# Allegro board proj1.brd
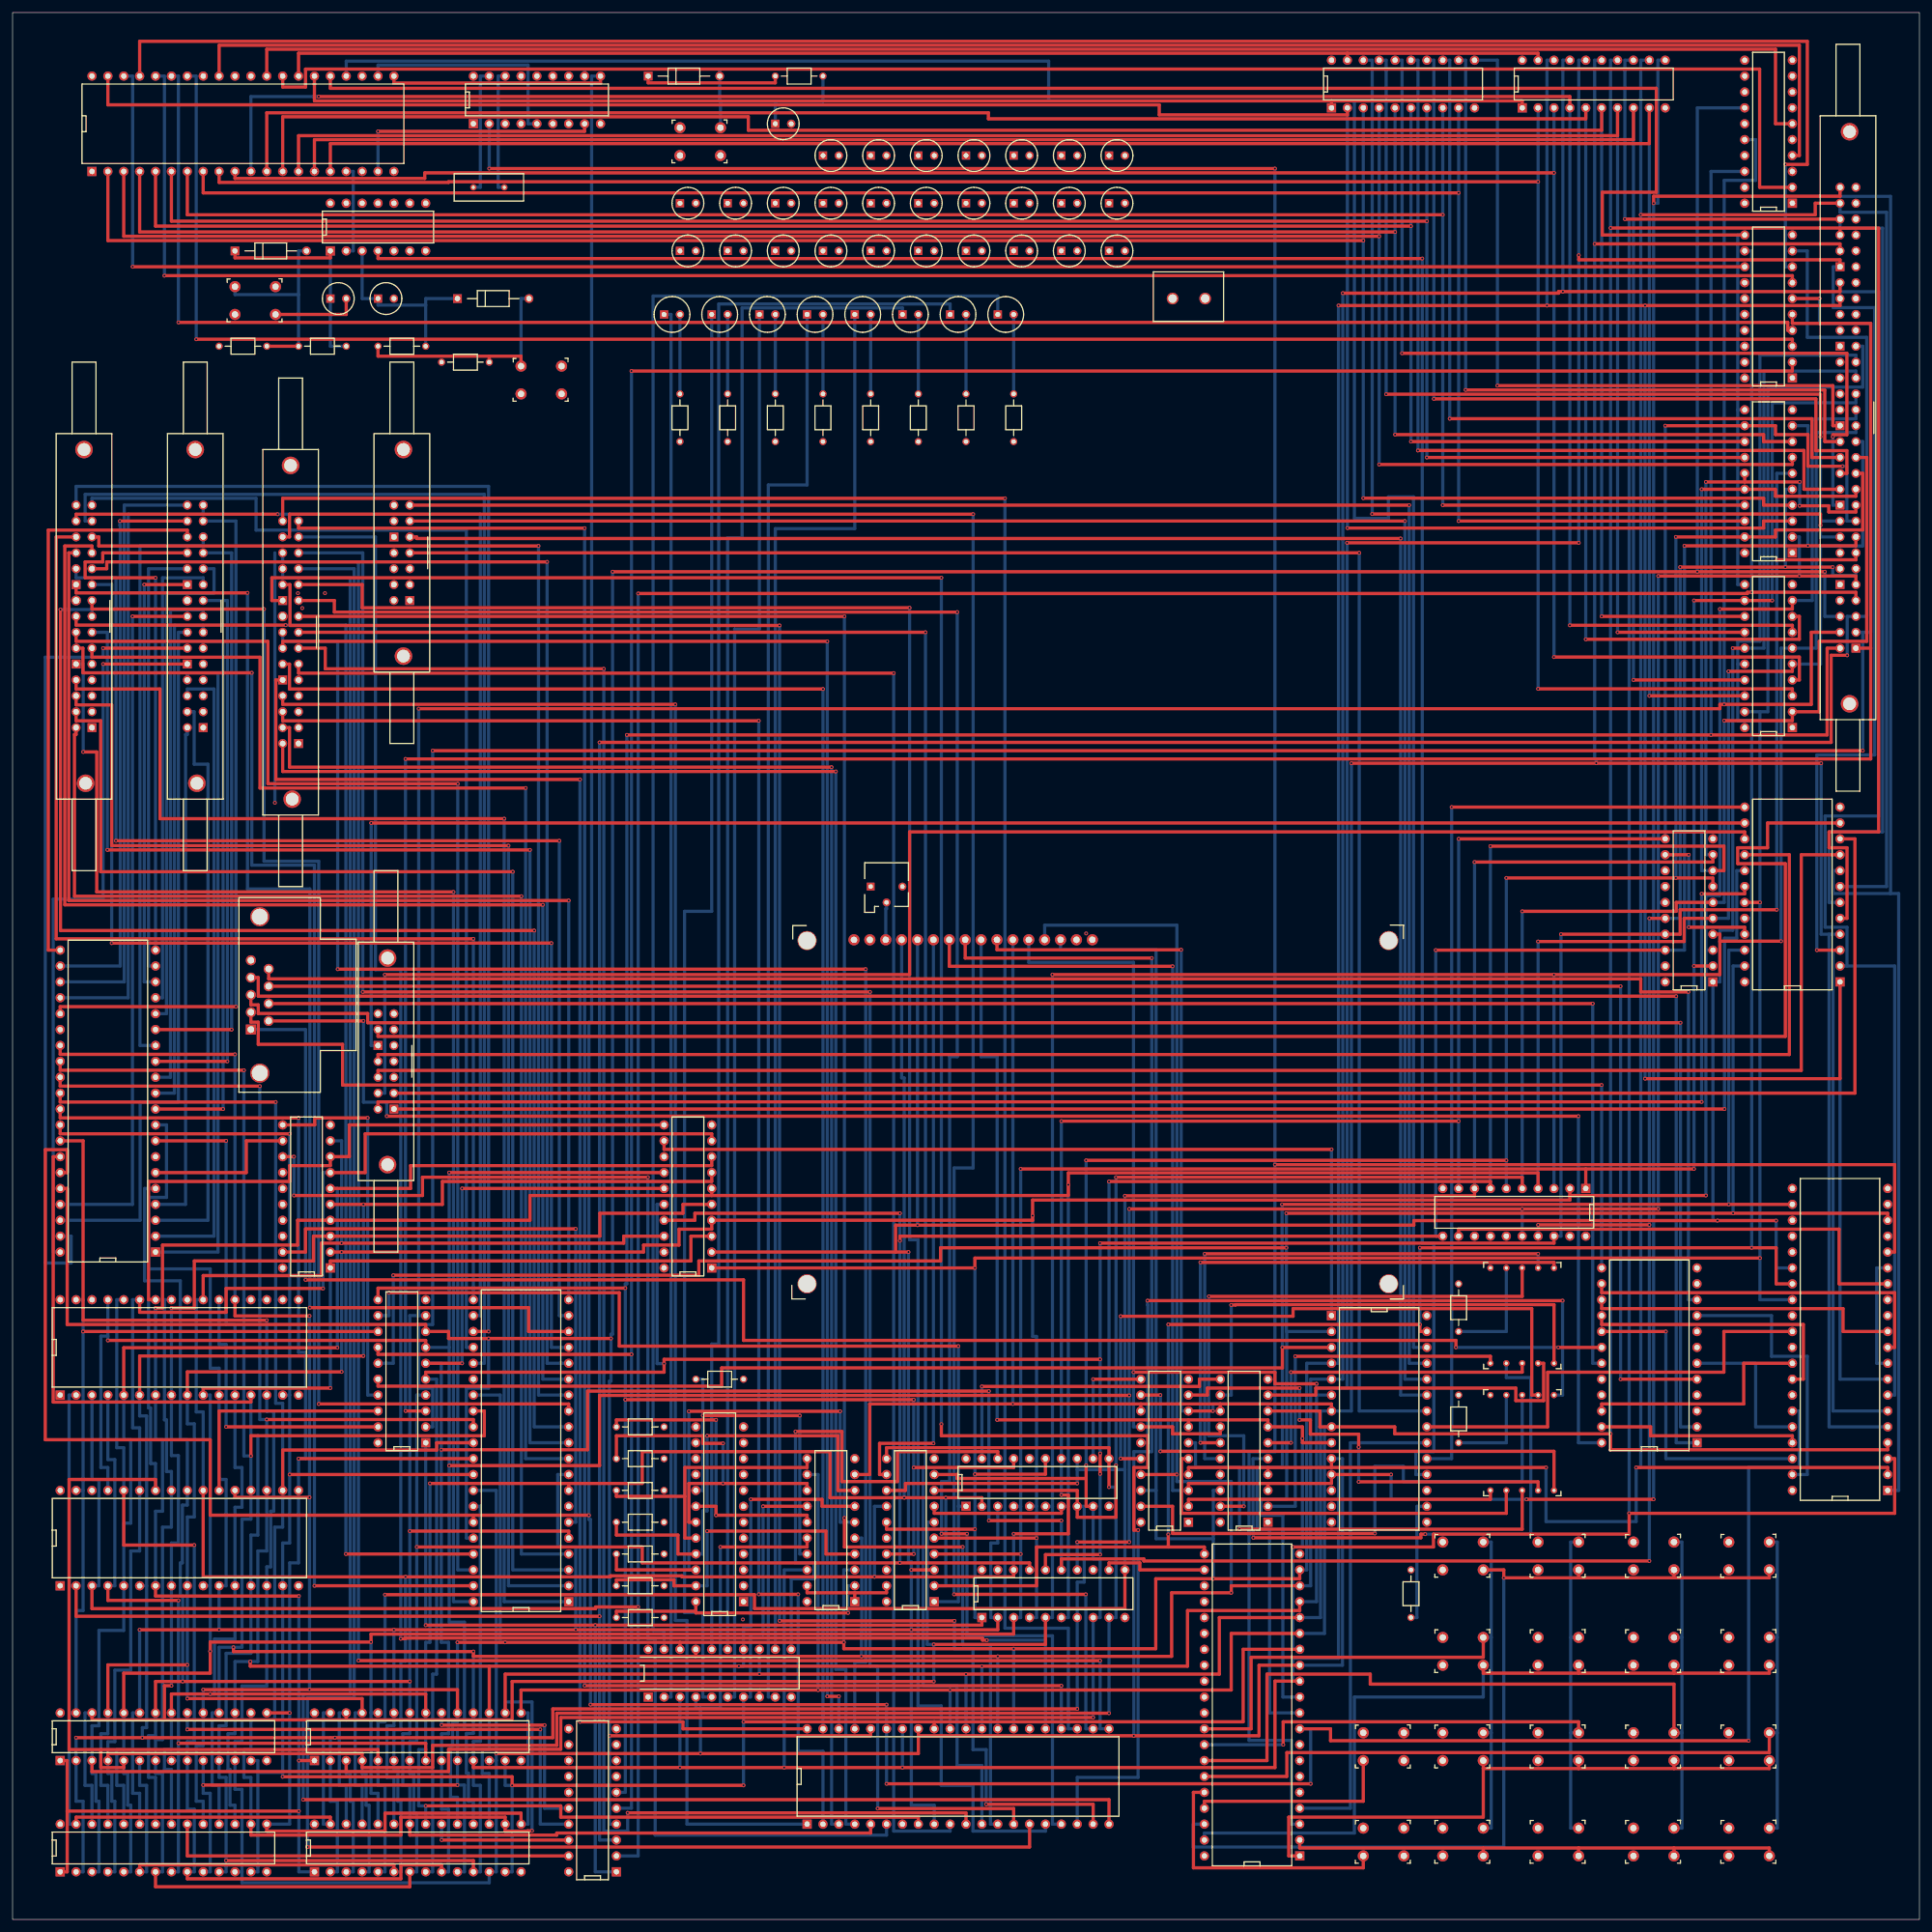
[diagram p0: board, top side]
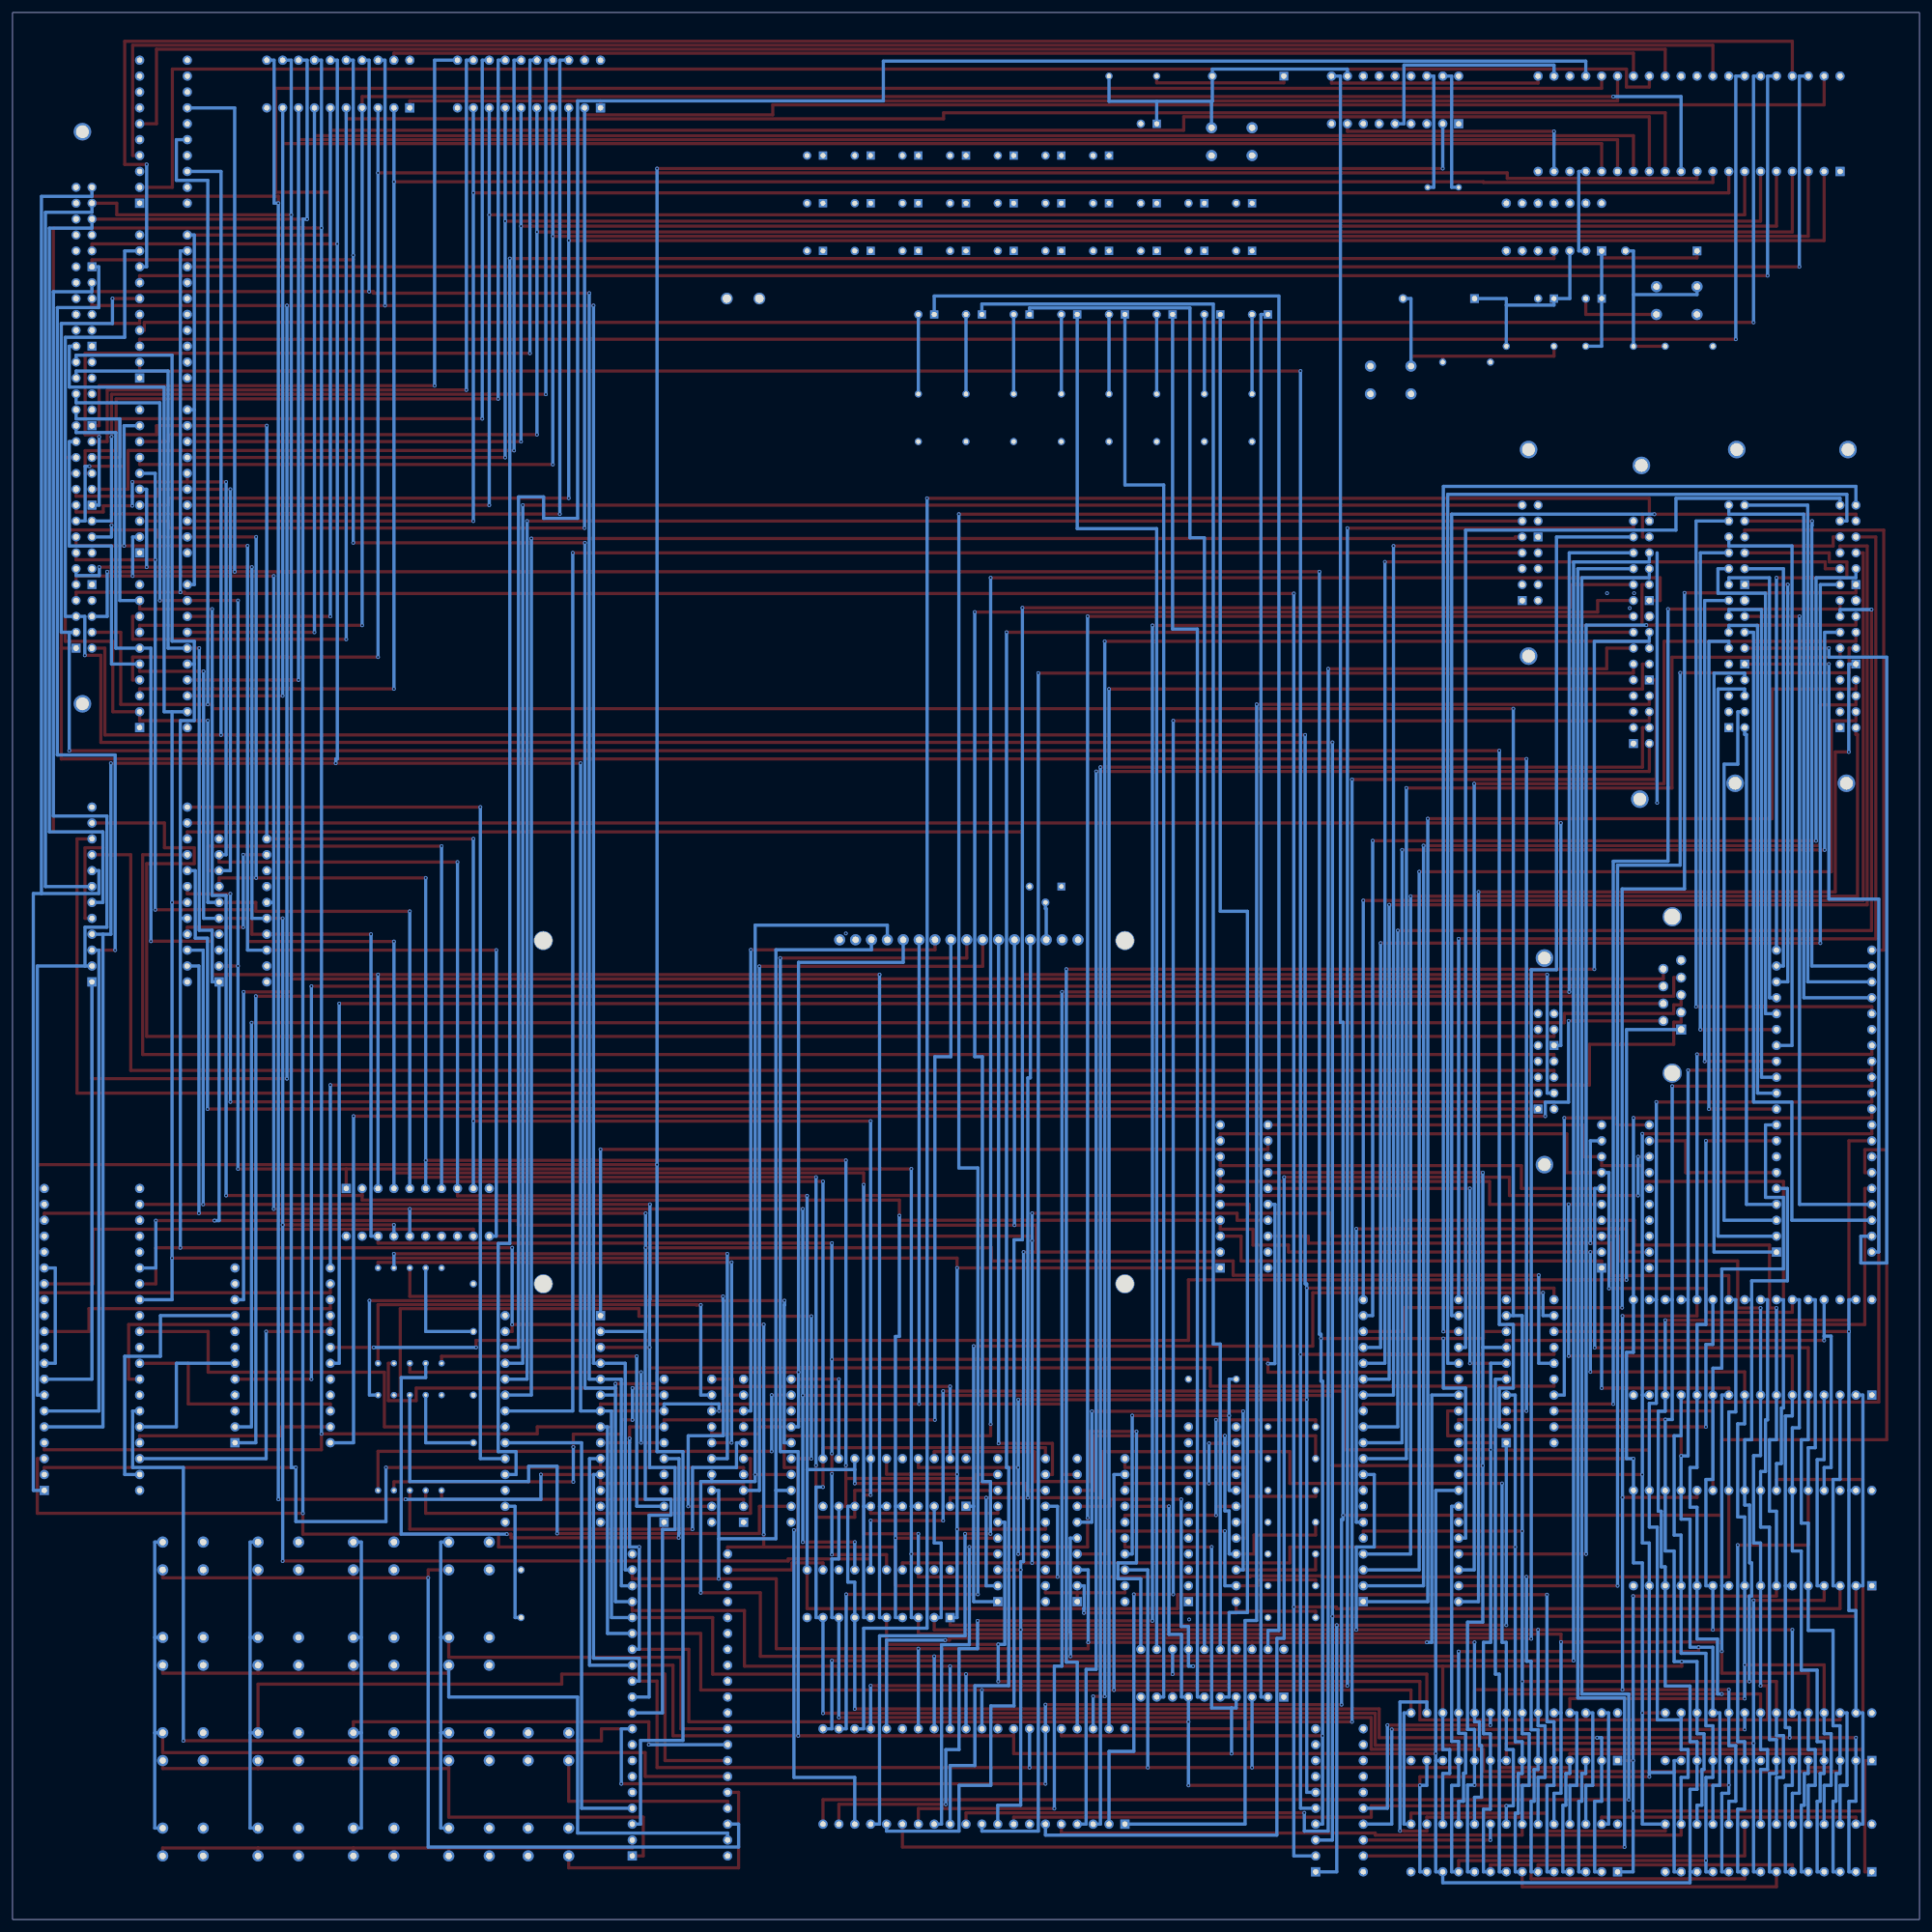
[diagram p1: board, bottom side, seen from below]

Outline 304.8 x 304.8 mm; copper layers: TOP, GND, POWER, BOTTOM. Coordinates in mm from the lower left corner of the outline.
Outline path: rectangle 0,0 304.8,304.8

## Placement (name value [footprint] x y rotation side)
C1  10u  [CPCYL1D200LS100031]  121.92 287.02 0 top
C8  0.1u  [CPCYL1D200LS100031]  175.26 266.7 0 top
C9  0.1u  [CPCYL1D200LS100031]  167.64 266.7 0 top
C10  0.1u  [CPCYL1D200LS100031]  160.02 266.7 0 top
C11  0.1u  [CPCYL1D200LS100031]  152.4 266.7 0 top
C12  0.1u  [CPCYL1D200LS100031]  144.78 266.7 0 top
C13  0.1u  [CPCYL1D200LS100031]  137.16 266.7 0 top
C14  100u  [CPCYL1D200LS100031]  129.54 266.7 0 top
C15  0.1u  [CPCYL1D200LS100031]  121.92 266.7 0 top
C16  0.1u  [CPCYL1D200LS100031]  114.3 266.7 0 top
C17  0.1u  [CPCYL1D200LS100031]  114.3 274.32 0 top
C18  0.1u  [CPCYL1D200LS100031]  121.92 274.32 0 top
C19  0.1u  [CPCYL1D200LS100031]  129.54 274.32 0 top
C20  0.1u  [CPCYL1D200LS100031]  137.16 274.32 0 top
C21  0.1u  [CPCYL1D200LS100031]  144.78 274.32 0 top
C22  0.1u  [CPCYL1D200LS100031]  152.4 274.32 0 top
C23  0.1u  [CPCYL1D200LS100031]  160.02 274.32 0 top
C24  0.1u  [CPCYL1D200LS100031]  167.64 274.32 0 top
C25  0.1u  [CPCYL1D200LS100031]  175.26 274.32 0 top
C26  0.1u  [CPCYL1D200LS100031]  175.26 281.94 0 top
C27  0.1u  [CPCYL1D200LS100031]  167.64 281.94 0 top
C28  CAP  [CPCYL1D200LS100031]  50.8 259.08 0 top
C29  CAP  [CPCYL1D200LS100031]  58.42 259.08 0 top
C30  0.1u  [CPCYL1D200LS100031]  160.02 281.94 0 top
C31  0.1u  [CPCYL1D200LS100031]  152.4 281.94 0 top
C32  0.1u  [CPCYL1D200LS100031]  144.78 281.94 0 top
C33  0.1u  [CPCYL1D200LS100031]  137.16 281.94 0 top
C34  0.1u  [CPCYL1D200LS100031]  129.54 281.94 0 top
C35  0.1u  [CPCYL1D200LS100031]  106.68 274.32 0 top
C36  0.1u  [CPCYL1D200LS100031]  106.68 266.7 0 top
D1  DIODE  [DAX1DO35]  101.6 294.64 0 top
D2  DIODE  [DAX1DO35]  35.56 266.7 0 top
D3  DIODE  [DAX1DO35]  71.12 259.08 0 top
D4  LED  [CYLD225LS100031]  157.48 256.54 0 top
D5  LED  [CYLD225LS100031]  149.86 256.54 0 top
D6  LED  [CYLD225LS100031]  142.24 256.54 0 top
D7  LED  [CYLD225LS100031]  134.62 256.54 0 top
D8  LED  [CYLD225LS100031]  127 256.54 0 top
D9  LED  [CYLD225LS100031]  119.38 256.54 0 top
D10  LED  [CYLD225LS100031]  111.76 256.54 0 top
D11  LED  [CYLD225LS100031]  104.14 256.54 0 top
J1  HEADER 15X2  [TYCO100VH30]  12.7 190.5 90 top
J4  HEADER 7X2  [TYCO100VH14J7]  60.96 129.54 90 top
J5  CONN DSUB 9-P  [DSUBRP318TM9]  38.1 142.24 90 top
J6  HEADER 7X2  [TYCO100VH14J7]  63.5 210.82 90 top
J7  CONN TRBLK 2  [PWR_TRM_BLK]  185.42 259.08 0 top
J8  HEADER 15X2  [TYCO100VH30]  30.48 190.5 90 top
J9  HEADER 15X2  [TYCO100VH30]  45.72 187.96 90 top
J10  HEADER 30x2/SM  [TYCO100VH60]  294.64 203.2 90 top
R1  10k  [AX300X100028]  121.92 294.64 0 top
R2  POT  [VRES1]  137.16 165.1 0 top
R3  10k  [AX300X100028]  231.14 93.98 90 top
R4  10k  [AX300X100028]  231.14 76.2 90 top
R5  RESISTOR  [AX300X100028]  33.02 251.46 0 top
R6  RESISTOR  [AX300X100028]  45.72 251.46 0 top
R7  RESISTOR  [AX300X100028]  68.58 248.92 0 top
R8  RESISTOR  [AX300X100028]  58.42 251.46 0 top
R9  RESISTOR  [AX300X100028]  106.68 236.22 90 top
R10  RESISTOR  [AX300X100028]  114.3 236.22 90 top
R11  RESISTOR  [AX300X100028]  121.92 236.22 90 top
R12  RESISTOR  [AX300X100028]  129.54 236.22 90 top
R13  RESISTOR  [AX300X100028]  137.16 236.22 90 top
R14  RESISTOR  [AX300X100028]  144.78 236.22 90 top
R15  RESISTOR  [AX300X100028]  152.4 236.22 90 top
R16  RESISTOR  [AX300X100028]  160.02 236.22 90 top
R17  RESISTOR  [AX300X100028]  223.52 48.26 90 top
R18  10k  [AX300X100028]  96.52 48.26 0 top
R19  10k  [AX300X100028]  96.52 53.34 0 top
R20  10k  [AX300X100028]  96.52 58.42 0 top
R21  10k  [AX300X100028]  96.52 63.5 0 top
R22  10k  [AX300X100028]  96.52 68.58 0 top
R23  10k  [AX300X100028]  96.52 73.66 0 top
R24  10k  [AX300X100028]  96.52 78.74 0 top
R25  10k  [AX300X100028]  109.22 86.36 0 top
SW1  SW TACT-SPST-2/SM  [PTS645]  106.68 281.94 0 top
SW2  SW TACT-SPST-2  [PTS645]  228.6 55.88 0 top
SW3  SW TACT-SPST-2  [PTS645]  243.84 55.88 0 top
SW4  SW TACT-SPST-2  [PTS645]  259.08 55.88 0 top
SW5  SW TACT-SPST-2  [PTS645]  274.32 55.88 0 top
SW6  SW TACT-SPST-2  [PTS645]  228.6 40.64 0 top
SW7  SW TACT-SPST-2  [PTS645]  243.84 40.64 0 top
SW8  SW TACT-SPST-2  [PTS645]  259.08 40.64 0 top
SW9  SW TACT-SPST-2  [PTS645]  274.32 40.64 0 top
SW10  SW TACT-SPST-2  [PTS645]  228.6 25.4 0 top
SW11  SW TACT-SPST-2  [PTS645]  243.84 25.4 0 top
SW12  SW TACT-SPST-2  [PTS645]  259.08 25.4 0 top
SW13  SW TACT-SPST-2  [PTS645]  274.32 25.4 0 top
SW14  SW TACT-SPST-2  [PTS645]  228.6 10.16 0 top
SW15  SW TACT-SPST-2  [PTS645]  243.84 10.16 0 top
SW16  SW TACT-SPST-2  [PTS645]  259.08 10.16 0 top
SW17  SW TACT-SPST-2  [PTS645]  274.32 10.16 0 top
SW18  SW TACT-SPST-2  [PTS645]  215.9 25.4 0 top
SW19  SW TACT-SPST-2  [PTS645]  215.9 10.16 0 top
SW21  SW TACT-SPST-2/SM  [PTS645]  35.56 256.54 0 top
SW22  SW TACT-SPST-2/SM  [PTS645]  81.28 243.84 0 top
SW24  SW DIP-12  [DIP10024W300L1275]  116.84 50.8 90 top
U1  8086MIN  [DIP10040W600L2025]  12.7 279.4 0 top
U2  8284A  [DIP10018W300L900]  73.66 287.02 0 top
U3  74LS244  [DIP10020W300L1000]  284.48 274.32 90 top
U4  74LS373  [DIP10020W300L1000]  284.48 246.38 90 top
U5  74LS373  [DIP10020W300L1000]  284.48 218.44 90 top
U6  74LS373  [DIP10020W300L1000]  284.48 190.5 90 top
U7  74LS245  [DIP10020W300L1000]  241.3 289.56 0 top
U8  74LS245  [DIP10020W300L1000]  210.82 289.56 0 top
U9  16L8  [DIP10020W300L1000]  66.04 76.2 90 top
U10  28F010  [DIP10032W600L1600]  7.62 53.34 0 top
U11  28F010  [DIP10032W600L1600]  7.62 83.82 0 top
U12  CY7C199  [DIP10028W300L1400]  7.62 7.62 0 top
U13  CY7C199  [DIP10028W300L1400]  48.26 7.62 0 top
U14  16L8  [DIP10020W300L1000]  96.52 7.62 90 top
U15  CY7C199  [DIP10028W300L1400]  7.62 25.4 0 top
U16  CY7C199  [DIP10028W300L1400]  48.26 25.4 0 top
U17  82C55  [DIP10040W600L2025]  88.9 50.8 90 top
U18  16L8  [DIP10020W300L1000]  50.8 104.14 90 top
U19  82C55  [DIP10040W600L2025]  22.86 106.68 90 top
U20  82C55  [DIP10040W600L2025]  127 15.24 0 top
U21  16L8  [DIP10020W300L1000]  154.94 48.26 0 top
U22  8279  [DIP10040W600L2025]  205.74 10.16 90 top
U23  8254  [DIP10024W600L1200]  292.1 149.86 90 top
U24  16L8  [DIP10020W300L1000]  271.78 149.86 90 top
U25  PC16550D  [DIP10040W600L2025]  299.72 68.58 90 top
U26  MAX235  [DIP10024W600L1200]  269.24 76.2 90 top
U27  16L8  [DIP10020W300L1000]  251.46 116.84 180 top
U28  8259A  [DIP10028W600L1400]  210.82 96.52 270 top
U29  16L8  [DIP10020W300L1000]  111.76 104.14 90 top
U30  LCD  [LCD_AMC2004A_REV1]  124.46 99.06 0 top
U31  7 Segment LED  [LED_HDSP_H101]  236.22 88.9 0 top
U32  74ALS374  [DIP10020W300L1000]  200.66 63.5 90 top
U33  7 Segment LED  [LED_HDSP_H101]  236.22 68.58 0 top
U34  74ALS374  [DIP10020W300L1000]  187.96 63.5 90 top
U35  74LS14  [DIP10014W300L700]  50.8 266.7 0 top
U37  74LS244  [DIP10020W300L1000]  134.62 50.8 90 top
U38  16L8  [DIP10020W300L1000]  152.4 66.04 0 top
U39  74LS374  [DIP10020W300L1000]  101.6 35.56 0 top
U40  16L8  [DIP10020W300L1000]  147.32 50.8 90 top
Y1  CRYSTAL  [XTAL_FOX]  73.66 276.86 0 top

## Library data of the parts
C1 = CAPACITOR
C8-C36 = CAP
D1-D3 = DIODE
D4-D11 = LED
J1 J8 J9 = HEADER 15X2
J4 J6 = HEADER 7X2
J5 = CONN DSUB 9-P
J7 = CONN TRBLK 2
J10 = HEADER 30x2/SM
R1 R3-R25 = RESISTOR
R2 = POT
SW1 SW21 SW22 = SW TACT-SPST-2/SM
SW2-SW19 = SW TACT-SPST-2
SW24 = SW DIP-12
U1 = 8086MIN
U2 = 8284A
U3 U37 = 74LS244
U4-U6 = 74LS373
U7 U8 = 74LS245
U9 = 16L8_8
U10 U11 = 28F010
U12 U13 U15 U16 = CY7C199
U14 U18 = 16L8
U17 U19 U20 = 82C55
U21 = 16L8_0
U22 = 8279
U23 = 8254
U24 = 16L8_1
U25 = PC16550D
U26 = MAX235
U27 = 16L8_2
U28 = 8259A
U29 = 16L8_3
U30 = LCD
U31 U33 = 7 Segment LED
U32 U34 = 74ALS374
U35 = 74LS14
U38 U40 = 16L8_10
U39 = 74LS374
Y1 = CRYSTAL

## Footprints (pads in the part's own frame, mm; a bottom-side part is the same pattern mirrored in y, then rotated)
AX300X100028
  round 1.143 hole 0.711: 1(0,0) 2(7.62,0)
CPCYL1D200LS100031
  rect 1.321x1.321 hole 0.787: 1(0,0)
  round 1.321 hole 0.787: 2(2.54,0)
CYLD225LS100031
  rect 1.321x1.321 hole 0.787: 1(0,0)
  round 1.321 hole 0.787: 2(2.54,0)
DAX1DO35
  rect 1.397x1.397 hole 0.864: 1(0,0)
  round 1.397 hole 0.864: 2(11.43,0)
DIP10014W300L700
  rect 1.473x1.473 hole 0.864: 1(0,0)
  round 1.473 hole 0.864: 2(2.54,0) 3(5.08,0) 4(7.62,0) 5(10.16,0) 6(12.7,0) 7(15.24,0) 8(15.24,7.62) 9(12.7,7.62) 10(10.16,7.62) 11(7.62,7.62) 12(5.08,7.62) 13(2.54,7.62) 14(0,7.62)
DIP10018W300L900
  rect 1.473x1.473 hole 0.864: 1(0,0)
  round 1.473 hole 0.864: 2(2.54,0) 3(5.08,0) 4(7.62,0) 5(10.16,0) 6(12.7,0) 7(15.24,0) 8(17.78,0) 9(20.32,0) 10(20.32,7.62) 11(17.78,7.62) 12(15.24,7.62) 13(12.7,7.62) 14(10.16,7.62) 15(7.62,7.62) 16(5.08,7.62) 17(2.54,7.62) 18(0,7.62)
DIP10020W300L1000
  rect 1.473x1.473 hole 0.864: 1(0,0)
  round 1.473 hole 0.864: 2(2.54,0) 3(5.08,0) 4(7.62,0) 5(10.16,0) 6(12.7,0) 7(15.24,0) 8(17.78,0) 9(20.32,0) 10(22.86,0) 11(22.86,7.62) 12(20.32,7.62) 13(17.78,7.62) 14(15.24,7.62) 15(12.7,7.62) 16(10.16,7.62) 17(7.62,7.62) 18(5.08,7.62) 19(2.54,7.62) 20(0,7.62)
DIP10024W300L1275
  rect 1.473x1.473 hole 0.864: 1(0,0)
  round 1.473 hole 0.864: 2(2.54,0) 3(5.08,0) 4(7.62,0) 5(10.16,0) 6(12.7,0) 7(15.24,0) 8(17.78,0) 9(20.32,0) 10(22.86,0) 11(25.4,0) 12(27.94,0) 13(27.94,7.62) 14(25.4,7.62) 15(22.86,7.62) 16(20.32,7.62) 17(17.78,7.62) 18(15.24,7.62) 19(12.7,7.62) 20(10.16,7.62) 21(7.62,7.62) 22(5.08,7.62) 23(2.54,7.62) 24(0,7.62)
DIP10024W600L1200
  rect 1.473x1.473 hole 0.864: 1(0,0)
  round 1.473 hole 0.864: 2(2.54,0) 3(5.08,0) 4(7.62,0) 5(10.16,0) 6(12.7,0) 7(15.24,0) 8(17.78,0) 9(20.32,0) 10(22.86,0) 11(25.4,0) 12(27.94,0) 13(27.94,15.24) 14(25.4,15.24) 15(22.86,15.24) 16(20.32,15.24) 17(17.78,15.24) 18(15.24,15.24) 19(12.7,15.24) 20(10.16,15.24) 21(7.62,15.24) 22(5.08,15.24) 23(2.54,15.24) 24(0,15.24)
DIP10028W300L1400
  rect 1.473x1.473 hole 0.864: 1(0,0)
  round 1.473 hole 0.864: 2(2.54,0) 3(5.08,0) 4(7.62,0) 5(10.16,0) 6(12.7,0) 7(15.24,0) 8(17.78,0) 9(20.32,0) 10(22.86,0) 11(25.4,0) 12(27.94,0) 13(30.48,0) 14(33.02,0) 15(33.02,7.62) 16(30.48,7.62) 17(27.94,7.62) 18(25.4,7.62) 19(22.86,7.62) 20(20.32,7.62) 21(17.78,7.62) 22(15.24,7.62) 23(12.7,7.62) 24(10.16,7.62) 25(7.62,7.62) 26(5.08,7.62) 27(2.54,7.62) 28(0,7.62)
DIP10028W600L1400
  rect 1.473x1.473 hole 0.864: 1(0,0)
  round 1.473 hole 0.864: 2(2.54,0) 3(5.08,0) 4(7.62,0) 5(10.16,0) 6(12.7,0) 7(15.24,0) 8(17.78,0) 9(20.32,0) 10(22.86,0) 11(25.4,0) 12(27.94,0) 13(30.48,0) 14(33.02,0) 15(33.02,15.24) 16(30.48,15.24) 17(27.94,15.24) 18(25.4,15.24) 19(22.86,15.24) 20(20.32,15.24) 21(17.78,15.24) 22(15.24,15.24) 23(12.7,15.24) 24(10.16,15.24) 25(7.62,15.24) 26(5.08,15.24) 27(2.54,15.24) 28(0,15.24)
DIP10032W600L1600
  rect 1.473x1.473 hole 0.864: 1(0,0)
  round 1.473 hole 0.864: 2(2.54,0) 3(5.08,0) 4(7.62,0) 5(10.16,0) 6(12.7,0) 7(15.24,0) 8(17.78,0) 9(20.32,0) 10(22.86,0) 11(25.4,0) 12(27.94,0) 13(30.48,0) 14(33.02,0) 15(35.56,0) 16(38.1,0) 17(38.1,15.24) 18(35.56,15.24) 19(33.02,15.24) 20(30.48,15.24) 21(27.94,15.24) 22(25.4,15.24) 23(22.86,15.24) 24(20.32,15.24) 25(17.78,15.24) 26(15.24,15.24) 27(12.7,15.24) 28(10.16,15.24) 29(7.62,15.24) 30(5.08,15.24) 31(2.54,15.24) 32(0,15.24)
DIP10040W600L2025
  rect 1.473x1.473 hole 0.864: 1(0,0)
  round 1.473 hole 0.864: 2(2.54,0) 3(5.08,0) 4(7.62,0) 5(10.16,0) 6(12.7,0) 7(15.24,0) 8(17.78,0) 9(20.32,0) 10(22.86,0) 11(25.4,0) 12(27.94,0) 13(30.48,0) 14(33.02,0) 15(35.56,0) 16(38.1,0) 17(40.64,0) 18(43.18,0) 19(45.72,0) 20(48.26,0) 21(48.26,15.24) 22(45.72,15.24) 23(43.18,15.24) 24(40.64,15.24) 25(38.1,15.24) 26(35.56,15.24) 27(33.02,15.24) 28(30.48,15.24) 29(27.94,15.24) 30(25.4,15.24) 31(22.86,15.24) 32(20.32,15.24) 33(17.78,15.24) 34(15.24,15.24) 35(12.7,15.24) 36(10.16,15.24) 37(7.62,15.24) 38(5.08,15.24) 39(2.54,15.24) 40(0,15.24)
DSUBRP318TM9
  rect 1.6x1.6 hole 1.067: 1(0,0)
  round 1.6 hole 1.067: 2(2.769,0) 3(5.537,0) 4(8.306,0) 5(11.074,0) 6(1.384,-2.845) 7(4.153,-2.845) 8(6.921,-2.845) 9(9.69,-2.845)
  round 3.048 hole 2.54: HOLE49(-6.96,-1.422) HOLE50(18.034,-1.422)
LCD_AMC2004A_REV1
  round 1.778 hole 1.029: 1(10.033,57.531) 2(12.573,57.531) 3(15.113,57.531) 4(17.653,57.531) 5(20.193,57.531) 6(22.733,57.531) 7(25.273,57.531) 8(27.813,57.531) 9(30.353,57.531) 10(32.893,57.531) 11(35.433,57.531) 12(37.973,57.531) 13(40.513,57.531) 14(43.053,57.531) 15(45.593,57.531) 16(48.133,57.531)
  round 3.048 hole 2.794: HOLE_LL(2.54,2.54) HOLE_LM(2.54,57.404) HOLE_LN(95.504,2.54) HOLE_LO(95.504,57.404)
LED_HDSP_H101
  round 1.016 hole 0.508: 1(0,0) 2(2.54,0) 3(5.08,0) 4(7.62,0) 5(10.16,0) 6(10.16,15.24) 7(7.62,15.24) 8(5.08,15.24) 9(2.54,15.24) 10(0,15.24)
PTS645
  round 1.778 hole 1.029: 1(0,0) 2(6.477,0) 3(0,4.445) 4(6.477,4.445)
PWR_TRM_BLK
  round 1.867 hole 1.359: 1(0,0) 2(5.207,0)
TYCO100VH14J7
  rect 1.422x1.422 hole 0.914: 1(0,0) 10(10.16,2.54)
  round 1.422 hole 0.914: 2(0,2.54) 3(2.54,0) 4(2.54,2.54) 5(5.08,0) 6(5.08,2.54) 7(7.62,0) 8(7.62,2.54) 9(10.16,0) 11(12.7,0) 12(12.7,2.54) 13(15.24,0) 14(15.24,2.54)
  round 2.794 hole 2.032: HOLE1(-8.89,1.016) HOLE2(24.13,1.016)
TYCO100VH30
  rect 1.422x1.422 hole 0.914: 1(0,0) 10(10.16,2.54) 20(22.86,2.54)
  round 1.422 hole 0.914: 2(0,2.54) 3(2.54,0) 4(2.54,2.54) 5(5.08,0) 6(5.08,2.54) 7(7.62,0) 8(7.62,2.54) 9(10.16,0) 11(12.7,0) 12(12.7,2.54) 13(15.24,0) 14(15.24,2.54) 15(17.78,0) 16(17.78,2.54) 17(20.32,0) 19(22.86,0) 21(25.4,0) 22(25.4,2.54) 23(27.94,0) 24(27.94,2.54) 25(30.48,0) 26(30.48,2.54) 27(33.02,0) 28(33.02,2.54) 29(35.56,0) 30(35.56,2.54)
  round 1.575 hole 1.067: 18(20.32,2.54)
  round 2.794 hole 2.032: HOLE1(-8.89,1.016) HOLE2(44.45,1.27)
TYCO100VH60
  rect 1.422x1.422 hole 0.914: 1(0,0) 10(10.16,2.54) 20(22.86,2.54) 30(35.56,2.54) 40(48.26,2.54) 50(60.96,2.54)
  round 1.422 hole 0.914: 2(0,2.54) 3(2.54,0) 4(2.54,2.54) 5(5.08,0) 6(5.08,2.54) 7(7.62,0) 8(7.62,2.54) 9(10.16,0) 11(12.7,0) 12(12.7,2.54) 13(15.24,0) 14(15.24,2.54) 15(17.78,0) 16(17.78,2.54) 17(20.32,0) 18(20.32,2.54) 19(22.86,0) 21(25.4,0) 22(25.4,2.54) 23(27.94,0) 24(27.94,2.54) 25(30.48,0) 26(30.48,2.54) 27(33.02,0) 28(33.02,2.54) 29(35.56,0) 31(38.1,0) 32(38.1,2.54) 33(40.64,0) 34(40.64,2.54) 35(43.18,0) 36(43.18,2.54) 37(45.72,0) 38(45.72,2.54) 39(48.26,0) 41(50.8,0) 42(50.8,2.54) 43(53.34,0) 44(53.34,2.54) 45(55.88,0) 46(55.88,2.54) 47(58.42,0) 48(58.42,2.54) 49(60.96,0) 51(63.5,0) 52(63.5,2.54) 53(66.04,0) 54(66.04,2.54) 55(68.58,0) 56(68.58,2.54) 57(71.12,0) 58(71.12,2.54) 59(73.66,0) 60(73.66,2.54)
  round 2.794 hole 2.032: HOLE1(-8.89,1.016) HOLE2(82.55,1.016)
VRES1
  rect 1.245x1.245 hole 0.711: 1(0,0)
  round 1.245 hole 0.711: 2(2.54,-2.54) 3(5.08,0)
XTAL_FOX
  round 1.016 hole 0.508: 1(0,0) 2(4.953,0)

## Nets
+5V: D1.1(K) R1.1
GND: C1.2 C8.1 C8.2 C9.1 C9.2 C10.1 C10.2 C11.1 C11.2 C12.1 C12.2 C13.1 C13.2 C14.1 C14.2 C15.1 C15.2 C16.1 C16.2 C17.1 C17.2 C18.1 C18.2 C19.1 C19.2 C20.1 C20.2 C21.1 C21.2 C22.1 C22.2 C23.1 C23.2 C24.1 C24.2 C25.1 C25.2 C26.1 C26.2 C27.1 C27.2 C29.2 C30.1 C30.2 C31.1 C31.2 C32.1 C32.2 C33.1 C33.2 C34.1 C34.2 C35.1 C35.2 C36.1 C36.2 J5.5 J7.1 J7.2 R2.1(A) R2.3(B) R3.2 R4.2 R5.1 R7.1 R9.1 R10.1 R11.1 R12.1 R13.1 R14.1 R15.1 R16.1 R17.2 R18.2 R19.2 R20.2 R21.2 R22.2 R23.2 R24.2 R25.2 SW1.2 SW18.3 SW19.3 SW21.1 SW22.2 SW24.1(A1) SW24.2(A2) SW24.3(A3) SW24.4(A4) SW24.5(A5) SW24.6(A6) SW24.7(A7) SW24.8(A8) U1.1 U1.20 U1.33(MN) U1.40 U2.1(CSYNC) U2.9 U2.13(F/C\) U2.18 U3.1(1\O\E\) U3.10 U3.19(2\O\E\) U3.20 U4.1(O\E\) U4.10 U4.20 U5.1(O\E\) U5.10 U5.20 U6.1(O\E\) U6.10 U6.20 U7.10 U7.20 U8.10 U8.20 U9.10 U9.20 U10.1(VPP) U10.16 U10.32 U11.1(VPP) U11.16 U11.32 U12.14 U12.28(VCC) U13.14 U13.28(VCC) U14.10 U14.20 U15.14 U15.28(VCC) U16.14 U16.28(VCC) U17.7 U17.26 U18.10 U18.20 U19.7 U19.26 U20.7 U20.26 U21.10 U21.20 U22.20 U22.40 U23.12 U23.24 U24.10 U24.20 U25.12(CS0) U25.13(CS1) U25.19(WR) U25.20 U25.21(R\D\) U25.25(A\D\S\) U25.40 U26.11 U26.12 U27.10 U27.20 U28.14 U28.28 U29.10 U29.20 U30.1(GND) U32.1(O\E\) U32.10 U32.20 U34.1(O\E\) U34.10 U34.20 U35.7 U35.14 U37.10 U37.20 U38.10 U38.20 U39.1(O\E\) U39.10 U39.20 U40.10 U40.20
VDD: U30.2(VDD)
A0: J10.39 U6.19(Q7) U9.1(I1) U14.1(I1) U21.1(I1) U23.19(A0) U25.28(A0) U29.1(I1) U38.15(O\5\) U40.15(O\5\)
A1: J10.37 U6.16(Q6) U10.12(A0) U11.12(A0) U12.21(A0) U13.21(A0) U15.21(A0) U16.21(A0) U17.8(A1) U19.8(A1) U20.8(A1) U22.21(A0) U23.20(A1) U25.27(A1) U28.27(A0) U30.4(RS) U38.2(I2) U40.2(I2)
A2: J10.35 U6.15(Q5) U10.11(A1) U11.11(A1) U12.23(A1) U13.23(A1) U15.23(A1) U16.23(A1) U17.9(A0) U19.9(A0) U20.9(A0) U21.2(I2) U24.1(I1) U25.26(A2) U29.2(I2) U30.5(R/W) U38.3(I3) U40.3(I3)
A3: J10.33 U6.12(Q4) U10.10(A2) U11.10(A2) U12.24(A2) U13.24(A2) U15.24(A2) U16.24(A2) U18.1(I1) U21.3(I3) U24.2(I2) U27.1(I1) U29.3(I3) U38.4(I4) U40.4(I4)
A4: J10.31 U6.9(Q3) U10.9(A3) U11.9(A3) U12.25(A3) U13.25(A3) U15.25(A3) U16.25(A3) U18.2(I2) U21.4(I4) U24.3(I3) U27.2(I2) U29.4(I4) U38.5(I5) U40.5(I5)
A5: J10.29 U6.6(Q2) U10.8(A4) U11.8(A4) U12.26(A4) U13.26(A4) U15.26(A4) U16.26(A4) U18.3(I3) U21.5(I5) U24.4(I4) U27.3(I3) U29.5(I5) U38.6(I6) U40.6(I6)
A6: J10.27 U6.5(Q1) U10.7(A5) U11.7(A5) U12.1(A5) U13.1(A5) U15.1(A5) U16.1(A5) U18.4(I4) U21.6(I6) U24.5(I5) U27.4(I4) U29.6(I6) U38.7(I7) U40.7(I7)
A7: J10.25 U6.2(Q0) U10.6(A6) U11.6(A6) U12.2(A6) U13.2(A6) U15.2(A6) U16.2(A6) U18.5(I5) U21.7(I7) U24.6(I6) U27.5(I5) U29.7(I7) U38.8(I8) U40.8(I8)
A8: J10.23 U5.19(Q7) U10.5(A7) U11.5(A7) U12.3(A7) U13.3(A7) U15.3(A7) U16.3(A7) U18.6(I6) U21.8(I8) U24.7(I7) U27.6(I6) U29.8(I8) U38.9(I9) U40.9(I9)
A9: J10.21 U5.16(Q6) U10.27(A8) U11.27(A8) U12.4(A8) U13.4(A8) U15.4(A8) U16.4(A8) U18.7(I7) U21.9(I9) U24.8(I8) U27.7(I7) U29.9(I9) U38.11(I10) U40.11(I10)
A10: J10.19 U5.15(Q5) U10.26(A9) U11.26(A9) U12.5(A9) U13.5(A9) U15.5(A9) U16.5(A9) U18.8(I8) U21.11(I10) U24.9(I9) U27.8(I8) U29.11(I10) U38.13(O\7\) U40.13(O\7\)
A11: J10.17 U5.12(Q4) U10.23(A10) U11.23(A10) U12.6(A10) U13.6(A10) U15.6(A10) U16.6(A10) U18.9(I9) U21.18(O\2\) U24.11(I10) U27.9(I9) U29.18(O\2\) U38.14(O\6\) U40.14(O\6\)
A12: J10.15 U5.9(Q3) U9.4(I4) U10.25(A11) U11.25(A11) U12.7(A11) U13.7(A11) U15.7(A11) U16.7(A11) U21.17(O\3\) U24.18(O\2\) U27.11(I10) U29.17(O\3\)
A12-A15: U9.12(O\8\) U38.1(I1) U40.1(I1)
A13: J10.13 U5.6(Q2) U9.5(I5) U10.4(A12) U11.4(A12) U12.8(A12) U13.8(A12) U15.8(A12) U16.8(A12) U21.16(O\4\) U24.17(O\3\) U27.18(O\2\) U29.16(O\4\)
A14: J10.11 U5.5(Q1) U9.6(I6) U10.28(A13) U11.28(A13) U12.9(A13) U13.9(A13) U15.9(A13) U16.9(A13) U21.15(O\5\) U24.16(O\4\) U27.17(O\3\) U29.15(O\5\)
A15: J10.9 U5.2(Q0) U9.7(I7) U10.29(A14) U11.29(A14) U12.10(A14) U13.10(A14) U15.10(A14) U16.10(A14) U21.14(O\6\) U24.15(O\5\) U27.16(O\4\) U29.14(O\6\)
A16: J10.7 U4.12(Q4) U10.3(A15) U11.3(A15) U14.2(I2)
A17: J10.5 U4.9(Q3) U10.2(A16) U11.2(A16) U14.3(I3)
A18: J10.3 U4.6(Q2) U9.2(I2)
A19: J10.1 U4.5(Q1) U9.3(I3)
A[0,12-15]: U9.17(O\3\) U18.11(I10)
AD0: U1.16(AD0) U6.18(D7) U7.9(A7)
AD1: U1.15(AD1) U6.17(D6) U7.8(A6)
AD2: U1.14(AD2) U6.14(D5) U7.7(A5)
AD3: U1.13(AD3) U6.13(D4) U7.6(A4)
AD4: U1.12(AD4) U6.8(D3) U7.5(A3)
AD5: U1.11(AD5) U6.7(D2) U7.4(A2)
AD6: U1.10(AD6) U6.4(D1) U7.3(A1)
AD7: U1.9(AD7) U6.3(D0) U7.2(A0)
AD8: U1.8(AD8) U5.18(D7) U8.9(A7)
AD9: U1.7(AD9) U5.17(D6) U8.8(A6)
AD10: U1.6(AD10) U5.14(D5) U8.7(A5)
AD11: U1.5(AD11) U5.13(D4) U8.6(A4)
AD12: U1.4(AD12) U5.8(D3) U8.5(A3)
AD13: U1.3(AD13) U5.7(D2) U8.4(A2)
AD14: U1.2(AD14) U5.4(D1) U8.3(A1)
AD15: U1.39(AD15) U5.3(D0) U8.2(A0)
AD16: U1.38(A16/S3) U4.13(D4)
AD17: U1.37(A17/S4) U4.8(D3)
AD18: U1.36(A18/S5) U4.7(D2)
AD19: U1.35(A19/S6) U4.4(D1)
ALE: U1.25(ALE) U4.11(L\E\) U5.11(L\E\) U6.11(L\E\)
BHE: U4.2(Q0) U9.14(O\6\) U14.5(I5)
BHEX: U1.34(B\H\E\/S7) U4.3(D0)
BWE: U9.13(O\7\) U10.31(W\E\) U11.31(W\E\) U12.27(W\E\) U13.27(W\E\) U15.27(W\E\) U16.27(W\E\)
D0: J10.60 U7.11(B7) U10.13(DQ0) U11.13(DQ0) U12.11(D0) U13.11(D0) U15.11(D0) U16.11(D0) U17.34(D0) U19.34(D0) U20.34(D0) U22.12(DB0) U23.8(D0) U25.1(D0) U28.11(D0) U30.7(DB0) U32.3(D0) U34.3(D0) U37.18(Y1) U39.3(D0)
D1: J10.58 U7.12(B6) U10.14(DQ1) U11.14(DQ1) U12.12(D1) U13.12(D1) U15.12(D1) U16.12(D1) U17.33(D1) U19.33(D1) U20.33(D1) U22.13(DB1) U23.7(D1) U25.2(D1) U28.10(D1) U30.8(DB1) U32.4(D1) U34.4(D1) U37.16(Y2) U39.4(D1)
D2: J10.56 U7.13(B5) U10.15(DQ2) U11.15(DQ2) U12.13(D2) U13.13(D2) U15.13(D2) U16.13(D2) U17.32(D2) U19.32(D2) U20.32(D2) U22.14(DB2) U23.6(D2) U25.3(D2) U28.9(D2) U30.9(DB2) U32.7(D2) U34.7(D2) U37.14(Y3) U39.7(D2)
D3: J10.54 U7.14(B4) U10.17(DQ3) U11.17(DQ3) U12.15(D3) U13.15(D3) U15.15(D3) U16.15(D3) U17.31(D3) U19.31(D3) U20.31(D3) U22.15(DB3) U23.5(D3) U25.4(D3) U28.8(D3) U30.10(DB3) U32.8(D3) U34.8(D3) U37.12(Y4) U39.8(D3)
D4: J10.52 U7.15(B3) U10.18(DQ4) U11.18(DQ4) U12.16(D4) U13.16(D4) U15.16(D4) U16.16(D4) U17.30(D4) U19.30(D4) U20.30(D4) U22.16(DB4) U23.4(D4) U25.5(D4) U28.7(D4) U30.11(DB4) U32.13(D4) U34.13(D4) U37.9(Y5) U39.13(D4)
D5: J10.50 U7.16(B2) U10.19(DQ5) U11.19(DQ5) U12.17(D5) U13.17(D5) U15.17(D5) U16.17(D5) U17.29(D5) U19.29(D5) U20.29(D5) U22.17(DB5) U23.3(D5) U25.6(D5) U28.6(D5) U30.12(DB5) U32.14(D5) U34.14(D5) U37.7(Y6) U39.14(D5)
D6: J10.48 U7.17(B1) U10.20(DQ6) U11.20(DQ6) U12.18(D6) U13.18(D6) U15.18(D6) U16.18(D6) U17.28(D6) U19.28(D6) U20.28(D6) U22.18(DB6) U23.2(D6) U25.7(D6) U28.5(D6) U30.13(DB6) U32.17(D6) U34.17(D6) U37.5(Y7) U39.17(D6)
D7: J10.46 U7.18(B0) U10.21(DQ7) U11.21(DQ7) U12.19(D7) U13.19(D7) U15.19(D7) U16.19(D7) U17.27(D7) U19.27(D7) U20.27(D7) U22.19(DB7) U23.1(D7) U25.8(D7) U28.4(D7) U30.14(DB7) U32.18(D7) U34.18(D7) U37.3(Y8) U39.18(D7)
D8: J10.30 U8.11(B7)
D9: J10.28 U8.12(B6)
D10: J10.26 U8.13(B5)
D11: J10.24 U8.14(B4)
D12: J10.22 U8.15(B3)
D13: J10.20 U8.16(B2)
D14: J10.18 U8.17(B1)
D15: J10.16 U8.18(B0)
DEN: U1.26(D\E\N\) U7.1(DIR) U8.1(DIR)
DTR: U1.27(DT/R\) U7.19(G\) U8.19(G\)
INTA: U1.24(I\N\T\A\) U28.26(I\N\T\A\)
INTR: U28.17(INT)
IORC: U9.16(O\4\) U22.10(R\D\) U23.22(R\D\) U25.22(RD) U28.3(R\D\)
IOWC: U9.15(O\5\) U22.11(W\R\) U23.23(W\R\) U25.18(W\R\) U28.2(W\R\)
IR1: U23.13(OUT1) U28.19(IR1)
IR2: U22.4(IRQ) U28.20(IR2)
IR3: U25.30(INTR) U28.21(IR3)
MIO: J10.2 U3.18(Y1) U9.11(I10) U14.6(I6) U38.17(O\3\) U40.17(O\3\)
MIOX: U1.28(M/I\O\) U3.2(A1)
PCLK: U2.2(PCLK) U22.3(CLK) U25.16(XIN)
RD: J10.4 U3.16(Y2) U9.9(I9) U10.24(O\E\) U11.24(O\E\) U12.22(O\E\) U13.22(O\E\) U15.22(O\E\) U16.22(O\E\) U17.5(R\D\) U19.5(R\D\) U20.5(R\D\)
RDX: U1.32(R\D\) U3.4(A2)
RESET: U1.21(RST) U2.10(RESET) U17.35(RESET) U19.35(RESET) U20.35(RESET) U22.9(RESET) U25.35(MR)
WR: J10.6 U3.14(Y3) U9.8(I8) U14.4(I4) U17.36(W\R\) U19.36(W\R\) U20.36(W\R\)
WRX: U1.29(W\R\) U3.6(A3)
N00598: C1.1 D1.2(A) R1.2 SW1.4 U2.11(R\E\S\)
N00858: U2.16(X2) Y1.2
N00870: U2.17(X1) Y1.1
N02031: U1.22(READY) U2.5(READY)
N02057: U1.19(CLK) U2.8(CLK)
N17816: U9.18(O\2\) U10.22(C\E\)
N17828: U9.19(O\1\) U11.22(C\E\)
N20853: U12.20(C\E\) U14.19(O\1\)
N20865: U13.20(C\E\) U14.18(O\2\)
N20889: U14.17(O\3\) U15.20(C\E\)
N22167: U14.16(O\4\) U16.20(C\E\)
N43084: U17.6(C\S\) U18.19(O\1\)
N43098: U18.12(O\8\) U19.6(C\S\)
N43134: U18.13(O\7\) U20.6(C\S\)
N55935: SW2.2 SW3.2 SW4.2 SW5.2 U22.38(RL0)
N56126: SW6.2 SW7.2 SW8.2 SW9.2 U22.39(RL1)
N56183: SW10.2 SW11.2 SW12.2 SW13.2 U22.1(RL2)
N56240: SW14.2 SW15.2 SW16.2 SW17.2 U22.2(RL3)
N56297: SW5.4 SW9.4 SW13.4 SW17.4 U22.35(SL3)
N56375: SW4.4 SW8.4 SW12.4 SW16.4 U22.34(SL2)
N56504: SW3.4 SW7.4 SW11.4 SW15.4 U22.33(SL1)
N56571: SW2.4 SW6.4 SW10.4 SW14.4 U22.32(SL0)
N56977: SW18.1 U22.37(CN/ST)
N56984: SW19.1 U22.36(SHFT)
N57547: U21.12(O\8\) U22.22(C\S\)
N72808: J4.12 U23.11(G0)
N72812: J4.10 U23.14(G1)
N72816: J4.8 U23.16(G2)
N72827: J4.4 U23.15(CLK1)
N72839: J4.2 U23.18(CLK2)
N73545: J4.6 U23.9(CLK0)
N73567: U23.21(C\S\) U24.12(O\8\)
N94994: J5.7 U26.19(T5OUT)
N95164: J5.4 U26.1(T4OUT)
N95197: J5.6 U26.24(R3IN)
N95219: J5.8 U26.5(R2IN)
N95249: J5.9 U26.10(R1IN)
N95927: U25.14(C\S\2\) U27.12(O\8\)
N96250: U25.9(RCLK) U25.15(B\A\U\D\O\U\T\)
N96341: U25.32(R\T\S\) U26.22(T5IN)
N96351: U25.11(SOUT) U26.15(T3IN)
N96734: J5.3 U26.2(T3OUT)
N96865: U25.10(SIN) U26.14(R5OUT)
N117395: U25.38(D\C\D\) U26.17(R4OUT)
N117411: U25.37(D\S\R\) U26.23(R3OUT)
N117434: U25.39(R\I\) U26.9(R1OUT)
N117444: U25.33(D\T\R\) U26.16(T4IN)
N123056: U28.1(C\S\) U29.12(O\8\)
N124807: R17.1 U28.16(SP/E\N\)
N125571: U28.18(IR0) U35.4(Y)
N146408: U1.17(NMI) U35.2(Y)
N146815: C28.1 D2.1(K) R6.2 U35.1(A)
N146827: D2.2(A) R5.2 R6.1 SW21.3
N147071: C28.2 SW21.2
N148364: C29.1 D3.1(K) R8.2 U35.3(A)
N148392: D3.2(A) R7.2 R8.1 SW22.3
N168940: J1.2 U17.4(PA0)
N168944: J1.4 U17.3(PA1)
N168948: J1.6 U17.2(PA2)
N168952: J1.8 U17.1(PA3)
N168956: J1.10 U17.40(PA4)
N168960: J1.12 U17.39(PA5)
N168964: J1.14 U17.38(PA6)
N168968: J1.16 U17.37(PA7)
N169017: J1.20 U17.18(PB0)
N169021: J1.22 U17.19(PB1)
N169045: J1.24 U17.20(PB2)
N169049: J1.26 U17.21(PB3)
N169053: J1.28 U17.22(PB4)
N169057: J1.30 U17.23(PB5)
N169089: J1.29 U17.24(PB6)
N169119: J1.27 U17.25(PB7)
N169149: J1.25 U17.14(PC0)
N169164: J1.23 U17.15(PC1)
N169179: J1.21 U17.16(PC2)
N169194: J1.19 U17.17(PC3)
N169209: J1.17 U17.13(PC4)
N169224: J1.15 U17.12(PC5)
N169374: J1.13 U17.11(PC6)
N169386: J1.11 U17.10(PC7)
N169826: J8.2 U19.4(PA0)
N169830: J8.4 U19.3(PA1)
N169834: J8.6 U19.2(PA2)
N169838: J8.8 U19.1(PA3)
N169842: J8.10 U19.40(PA4)
N169846: J8.12 U19.39(PA5)
N169850: J8.14 U19.38(PA6)
N169854: J8.16 U19.37(PA7)
N169858: J8.20 U19.18(PB0)
N169862: J8.22 U19.19(PB1)
N169866: J8.24 U19.20(PB2)
N169870: J8.26 U19.21(PB3)
N169874: J8.28 U19.22(PB4)
N169878: J8.30 U19.23(PB5)
N169882: J8.29 U19.24(PB6)
N169902: J8.27 U19.25(PB7)
N169922: J8.25 U19.14(PC0)
N169934: J8.23 U19.15(PC1)
N169946: J8.21 U19.16(PC2)
N169958: J8.19 U19.17(PC3)
N169970: J8.17 U19.13(PC4)
N169982: J8.15 U19.12(PC5)
N169994: J8.13 U19.11(PC6)
N170006: J8.11 U19.10(PC7)
N170780: J9.2 U20.4(PA0)
N170784: J9.4 U20.3(PA1)
N170788: J9.6 U20.2(PA2)
N170792: J9.8 U20.1(PA3)
N170796: J9.10 U20.40(PA4)
N170800: J9.12 U20.39(PA5)
N170804: J9.14 U20.38(PA6)
N170808: J9.16 U20.37(PA7)
N170812: J9.20 U20.18(PB0)
N170816: J9.22 U20.19(PB1)
N170820: J9.24 U20.20(PB2)
N170824: J9.26 U20.21(PB3)
N170828: J9.28 U20.22(PB4)
N170832: J9.30 U20.23(PB5)
N170836: J9.29 U20.24(PB6)
N170856: J9.27 U20.25(PB7)
N170876: J9.25 U20.14(PC0)
N170888: J9.23 U20.15(PC1)
N170900: J9.21 U20.16(PC2)
N170912: J9.19 U20.17(PC3)
N170924: J9.17 U20.13(PC4)
N170936: J9.15 U20.12(PC5)
N170948: J9.13 U20.11(PC6)
N170960: J9.11 U20.10(PC7)
N203105: R3.1 U31.9(E)
N203221: R4.1 U33.9(E)
N203712: U32.11(CLK) U38.19(O\1\)
N203945: U34.11(CLK) U38.12(O\8\)
N213913: D4.1(CATHODE) U39.19(Q7)
N213927: D5.1(CATHODE) U39.16(Q6)
N213934: D6.1(CATHODE) U39.15(Q5)
N213941: D7.1(CATHODE) U39.12(Q4)
N213948: D8.1(CATHODE) U39.9(Q3)
N213955: D9.1(CATHODE) U39.6(Q2)
N213962: D10.1(CATHODE) U39.5(Q1)
N213969: D11.1(CATHODE) U39.2(Q0)
N284755: J6.7 U28.22(IR4)
N284759: J6.9 U28.23(IR5)
N284763: J6.11 U28.24(IR6)
N284767: J6.13 U28.25(IR7)
N305126: U25.36(C\T\S\) U26.6(R2OUT)
N315045: U38.18(O\2\) U39.11(CLK)
N362638: R19.1 SW24.23(B2) U37.4(A2)
N362642: R20.1 SW24.22(B3) U37.6(A3)
N362646: R21.1 SW24.21(B4) U37.8(A4)
N362650: R23.1 SW24.19(B6) U37.13(A6)
N362654: R24.1 SW24.18(B7) U37.15(A7)
N362658: R25.1 SW24.17(B8) U37.17(A8)
N362662: R22.1 SW24.20(B5) U37.11(A5)
N362810: U37.1(1\O\E\) U37.19(2\O\E\) U40.19(O\1\)
N362842: R18.1 SW24.24(B1) U37.2(A1)
N363730: R2.2(WIPER) U30.3(V0)
N366051: U30.6(E) U40.12(O\8\)
N424045: J4.1 U23.17(OUT2)
N424052: J4.3 U23.10(OUT0)
N430513: J5.1 U26.18(R4IN)
N430520: J5.2 U26.13(R5IN)
N2030970: U31.1(D0) U32.2(Q0)
N2030971: U31.2(D1) U32.5(Q1)
N2030972: U31.3(D2) U32.6(Q2)
N2030973: U31.4(D3) U32.9(Q3)
N2030974: U31.5(D4) U32.12(Q4)
N2030975: U31.6(D5) U32.15(Q5)
N2030976: U31.7(D6) U32.16(Q6)
N2030977: U31.8(D7) U32.19(Q7)
N2032530: U33.1(D0) U34.2(Q0)
N2032531: U33.2(D1) U34.5(Q1)
N2032532: U33.3(D2) U34.6(Q2)
N2032533: U33.4(D3) U34.9(Q3)
N2032534: U33.5(D4) U34.12(Q4)
N2032535: U33.6(D5) U34.15(Q5)
N2032536: U33.7(D6) U34.16(Q6)
N2032537: U33.8(D7) U34.19(Q7)
N2136990: D4.2(ANODE) R16.2
N2137510: D5.2(ANODE) R15.2
N2137770: D6.2(ANODE) R14.2
N2138030: D7.2(ANODE) R13.2
N2138290: D8.2(ANODE) R12.2
N2138550: D9.2(ANODE) R11.2
N2138810: D10.2(ANODE) R10.2
N2139070: D11.2(ANODE) R9.2

Pads without a net: J1 1 3 5 7 9 18 HOLE1 HOLE2; J4 5 7 9 11 13 14 HOLE1 HOLE2; J5 HOLE49 HOLE50; J6 1 2 3 4 5 6 8 10 12 14 HOLE1 HOLE2; J8 1 3 5 7 9 18 HOLE1 HOLE2; J9 1 3 5 7 9 18 HOLE1 HOLE2; J10 8 10 12 14 32 34 36 38 40 41 42 43 44 45 47 49 51 53 55 57 59 HOLE1 HOLE2; SW1 1 3; SW2 1 3; SW3 1 3; SW4 1 3; SW5 1 3; SW6 1 3; SW7 1 3; SW8 1 3; SW9 1 3; SW10 1 3; SW11 1 3; SW12 1 3; SW13 1 3; SW14 1 3; SW15 1 3; SW16 1 3; SW17 1 3; SW18 2 4; SW19 2 4; SW21 4; SW22 1 4; SW24 9 10 11 12 13 14 15 16; U1 18 23 30 31; U2 3 4 6 7 12 14 15; U3 3 5 7 8 9 11 12 13 15 17; U4 14 15 16 17 18 19; U10 30; U11 30; U14 7 8 9 11 12 13 14 15; U18 14 15 16 17 18; U21 13 19; U22 5 6 7 8 23 24 25 26 27 28 29 30 31; U24 13 14 19; U25 17 23 24 29 31 34; U26 3 4 7 8 20 21; U27 13 14 15 19; U28 12 13 15; U29 13 19; U30 15 16 HOLE_LL HOLE_LM HOLE_LN HOLE_LO; U31 10; U33 10; U35 5 6 8 9 10 11 12 13; U38 16; U40 16 18

## Via types
v1: diameter 0.61, hole 0.33, TOP to BOTTOM, 498 vias

## Routing (per net, layer and track width the routed paths; a pad name or vN(x,y) marks a point on that pad's centre or on a via; arc(x,y) is an arc through that point)
+5V: length 22.5
  TOP w0.508: R1.1 121.92,293.56 101.6,293.56 D1.1
GND: length 698.6
  GND w0.508: 49.88,127 U18.10 ; U18.10 51.72,127 ; U18.10 50.8,126.08 ; U18.10 50.8,127.92 ; 154.02,55.88 U21.20 ; U21.20 155.86,55.88 ; U21.20 154.94,54.96 ; U21.20 154.94,56.8 ; 136.41,236.22 R13.1 ; R13.1 137.16,236.97 ; R13.1 137.91,236.22 ; R13.1 137.16,235.47 ; 81.28,24.48 U16.14 ; U16.14 82.2,25.4 ; U16.14 80.36,25.4 ; U16.14 81.28,26.32 ; C13.1 138,266.7 ; C13.1 137.16,267.54 ; C13.1 137.16,265.86 ; C13.1 136.32,266.7 ; U29.20 104.14,105.06 ; U29.20 105.06,104.14 ; U29.20 104.14,103.22 ; U29.20 103.22,104.14 ; 292.1,176.88 U23.12 ; U23.12 292.1,178.72 ; U23.12 291.18,177.8 ; U23.12 293.02,177.8 ; R23.2 104.14,74.41 ; R23.2 103.39,73.66 ; R23.2 104.89,73.66 ; R23.2 104.14,72.91 ; 160.02,265.86 C10.1 ; C10.1 160.86,266.7 ; C10.1 160.02,267.54 ; C10.1 159.18,266.7 ; U25.20 299.72,117.76 ; U25.20 298.8,116.84 ; U25.20 299.72,115.92 ; U25.20 300.64,116.84 ; 60.96,278.48 U1.20 ; U1.20 60.04,279.4 ; U1.20 61.88,279.4 ; U1.20 60.96,280.32 ; U24.20 264.16,150.78 ; U24.20 264.16,148.94 ; U24.20 265.08,149.86 ; U24.20 263.24,149.86 ; C32.2 148.16,281.94 ; C32.2 146.48,281.94 ; C32.2 147.32,281.1 ; C32.2 147.32,282.78 ; 7.62,98.14 U11.32 ; U11.32 6.7,99.06 ; U11.32 7.62,99.98 ; U11.32 8.54,99.06 ; 187.04,86.36 U34.10 ; U34.10 187.96,87.28 ; U34.10 187.96,85.44 ; U34.10 188.88,86.36 ; 34.49,256.54 SW21.1 ; SW21.1 35.56,257.61 ; SW21.1 36.63,256.54 ; SW21.1 35.56,255.47 ; 199.74,86.36 U32.10 ; U32.10 201.58,86.36 ; U32.10 200.66,87.28 ; U32.10 200.66,85.44 ; 6.7,53.34 U10.1 ; U10.1 8.54,53.34 ; U10.1 7.62,54.26 ; U10.1 7.62,52.42 ; U2.13 86.36,295.56 ; U2.13 85.44,294.64 ; U2.13 87.28,294.64 ; U2.13 86.36,293.72 ; 177.8,281.1 C26.2 ; C26.2 178.64,281.94 ; C26.2 177.8,282.78 ; C26.2 176.96,281.94 ; 231.14,100.85 R3.2 ; R3.2 231.14,102.35 ; R3.2 231.89,101.6 ; R3.2 230.39,101.6 ; 264.16,288.64 U7.10 ; U7.10 265.08,289.56 ; U7.10 264.16,290.48 ; U7.10 263.24,289.56 ; 241.3,296.26 U7.20 ; U7.20 242.22,297.18 ; U7.20 240.38,297.18 ; U7.20 241.3,298.1 ; 299.72,95.6 U25.12 ; U25.12 298.8,96.52 ; U25.12 299.72,97.44 ; U25.12 300.64,96.52 ; 73.66,85.44 U17.26 ; U17.26 73.66,87.28 ; U17.26 72.74,86.36 ; U17.26 74.58,86.36 ; C36.2 109.22,267.54 ; C36.2 110.06,266.7 ; C36.2 108.38,266.7 ; C36.2 109.22,265.86 ; U25.19 299.72,115.22 ; U25.19 299.72,113.38 ; U25.19 300.64,114.3 ; U25.19 298.8,114.3 ; C9.2 170.18,267.54 ; C9.2 171.02,266.7 ; C9.2 169.34,266.7 ; C9.2 170.18,265.86 ; C11.2 155.78,266.7 ; C11.2 154.1,266.7 ; C11.2 154.94,267.54 ; C11.2 154.94,265.86 ; 144.78,273.48 C21.1 ; C21.1 145.62,274.32 ; C21.1 144.78,275.16 ; C21.1 143.94,274.32 ; 270.86,172.72 U24.10 ; U24.10 272.7,172.72 ; U24.10 271.78,171.8 ; U24.10 271.78,173.64 ; C25.1 176.1,274.32 ; C25.1 175.26,273.48 ; C25.1 174.42,274.32 ; C25.1 175.26,275.16 ; C11.1 152.4,267.54 ; C11.1 152.4,265.86 ; C11.1 151.56,266.7 ; C11.1 153.24,266.7 ; 87.76,242.77 87.76,243.84 ; 87.76,243.84 87.76,244.91 ; 87.76,243.84 86.69,243.84 ; 87.76,243.84 88.83,243.84 ; 123.62,274.32 C18.2 ; C18.2 125.3,274.32 ; C18.2 124.46,273.48 ; C18.2 124.46,275.16 ; U20.26 162.56,31.4 ; U20.26 163.48,30.48 ; U20.26 162.56,29.56 ; U20.26 161.64,30.48 ; C34.1 129.54,282.78 ; C34.1 130.38,281.94 ; C34.1 129.54,281.1 ; C34.1 128.7,281.94 ; 44.8,83.82 U11.16 ; U11.16 46.64,83.82 ; U11.16 45.72,84.74 ; U11.16 45.72,82.9 ; R24.2 104.14,79.49 ; R24.2 103.39,78.74 ; R24.2 104.14,77.99 ; R24.2 104.89,78.74 ; U2.18 74.58,294.64 ; U2.18 72.74,294.64 ; U2.18 73.66,293.72 ; U2.18 73.66,295.56 ; C32.1 145.62,281.94 ; C32.1 144.78,282.78 ; C32.1 144.78,281.1 ; C32.1 143.94,281.94 ; R2.1 137.96,165.1 ; R2.1 136.36,165.1 ; R2.1 137.16,165.9 ; R2.1 137.16,164.3 ; 232.76,289.56 U8.10 ; U8.10 233.68,290.48 ; U8.10 233.68,288.64 ; U8.10 234.6,289.56 ; U3.1 285.4,274.32 ; U3.1 284.48,275.24 ; U3.1 284.48,273.4 ; U3.1 283.56,274.32 ; SW1.2 113.16,283.01 ; SW1.2 112.09,281.94 ; SW1.2 114.23,281.94 ; SW1.2 113.16,280.87 ; 115.92,58.42 SW24.4 ; SW24.4 117.76,58.42 ; SW24.4 116.84,59.34 ; SW24.4 116.84,57.5 ; 114.3,235.47 R10.1 ; R10.1 114.3,236.97 ; R10.1 115.05,236.22 ; R10.1 113.55,236.22 ; 115.92,50.8 SW24.1 ; SW24.1 117.76,50.8 ; SW24.1 116.84,49.88 ; SW24.1 116.84,51.72 ; C22.1 152.4,275.16 ; C22.1 151.56,274.32 ; C22.1 153.24,274.32 ; C22.1 152.4,273.48 ; R16.1 160.77,236.22 ; R16.1 159.27,236.22 ; R16.1 160.02,235.47 ; R16.1 160.02,236.97 ; C15.2 125.3,266.7 ; C15.2 123.62,266.7 ; C15.2 124.46,265.86 ; C15.2 124.46,267.54 ; 209.9,63.5 U28.14 ; U28.14 211.74,63.5 ; U28.14 210.82,64.42 ; U28.14 210.82,62.58 ; U15.14 40.64,26.32 ; U15.14 40.64,24.48 ; U15.14 39.72,25.4 ; U15.14 41.56,25.4 ; 60.12,259.08 C29.2 ; C29.2 60.96,259.92 ; C29.2 61.8,259.08 ; C29.2 60.96,258.24 ; 159.18,281.94 C30.1 ; C30.1 160.86,281.94 ; C30.1 160.02,281.1 ; C30.1 160.02,282.78 ; 66.04,98.14 U9.10 ; U9.10 65.12,99.06 ; U9.10 66.04,99.98 ; U9.10 66.96,99.06 ; C25.2 178.64,274.32 ; C25.2 177.8,273.48 ; C25.2 176.96,274.32 ; C25.2 177.8,275.16 ; 268.32,101.6 U26.11 ; U26.11 269.24,102.52 ; U26.11 270.16,101.6 ; U26.11 269.24,100.68 ; 299.72,98.14 U25.13 ; U25.13 299.72,99.98 ; U25.13 298.8,99.06 ; U25.13 300.64,99.06 ; C23.2 162.56,275.16 ; C23.2 163.4,274.32 ; C23.2 162.56,273.48 ; C23.2 161.72,274.32 ; U12.14 41.56,7.62 ; U12.14 39.72,7.62 ; U12.14 40.64,8.54 ; U12.14 40.64,6.7 ; 116.84,60.04 SW24.5 ; SW24.5 117.76,60.96 ; SW24.5 115.92,60.96 ; SW24.5 116.84,61.88 ; 284.48,217.52 U5.1 ; U5.1 284.48,219.36 ; U5.1 285.4,218.44 ; U5.1 283.56,218.44 ; 162.56,281.1 C30.2 ; C30.2 162.56,282.78 ; C30.2 161.72,281.94 ; C30.2 163.4,281.94 ; 103.39,68.58 R22.2 ; R22.2 104.89,68.58 ; R22.2 104.14,67.83 ; R22.2 104.14,69.33 ; 166.8,274.32 C24.1 ; C24.1 167.64,273.48 ; C24.1 167.64,275.16 ; C24.1 168.48,274.32 ; U14.10 96.52,31.4 ; U14.10 97.44,30.48 ; U14.10 95.6,30.48 ; U14.10 96.52,29.56 ; 151.48,73.66 U38.20 ; U38.20 152.4,72.74 ; U38.20 153.32,73.66 ; U38.20 152.4,74.58 ; U34.20 181.26,63.5 ; U34.20 180.34,64.42 ; U34.20 179.42,63.5 ; 73.66,286.1 U2.1 ; U2.1 73.66,287.94 ; U2.1 72.74,287.02 ; U2.1 74.58,287.02 ; 222.77,55.88 R17.2 ; R17.2 223.52,55.13 ; R17.2 223.52,56.63 ; R17.2 224.27,55.88 ; C17.1 115.14,274.32 ; C17.1 114.3,275.16 ; C17.1 113.46,274.32 ; C17.1 114.3,273.48 ; SW24.7 116.84,66.96 ; SW24.7 116.84,65.12 ; SW24.7 117.76,66.04 ; SW24.7 115.92,66.04 ; U14.20 89.82,7.62 ; U14.20 87.98,7.62 ; U14.20 88.9,8.54 ; U14.20 88.9,6.7 ; U13.14 82.2,7.62 ; U13.14 80.36,7.62 ; U13.14 81.28,8.54 ; U13.14 81.28,6.7 ; 108.38,274.32 C35.2 ; C35.2 110.06,274.32 ; C35.2 109.22,275.16 ; C35.2 109.22,273.48 ; 116.09,86.36 R25.2 ; R25.2 117.59,86.36 ; R25.2 116.84,87.11 ; R25.2 116.84,85.61 ; U38.10 176.18,66.04 ; U38.10 174.34,66.04 ; U38.10 175.26,66.96 ; U38.10 175.26,65.12 ; 123.62,287.02 C1.2 ; C1.2 124.46,286.18 ; C1.2 124.46,287.86 ; C1.2 125.3,287.02 ; R7.1 69.33,248.92 ; R7.1 67.83,248.92 ; R7.1 68.58,248.17 ; R7.1 68.58,249.67 ; U39.1 101.6,36.48 ; U39.1 100.68,35.56 ; U39.1 102.52,35.56 ; U39.1 101.6,34.64 ; R15.1 152.4,236.97 ; R15.1 153.15,236.22 ; R15.1 152.4,235.47 ; R15.1 151.65,236.22 ; 129.54,235.47 R12.1 ; R12.1 130.29,236.22 ; R12.1 128.79,236.22 ; R12.1 129.54,236.97 ; C19.2 132.08,275.16 ; C19.2 132.08,273.48 ; C19.2 132.92,274.32 ; C19.2 131.24,274.32 ; 6.7,33.02 U15.28 ; U15.28 8.54,33.02 ; U15.28 7.62,32.1 ; U15.28 7.62,33.94 ; 48.26,14.32 U13.28 ; U13.28 49.18,15.24 ; U13.28 48.26,16.16 ; U13.28 47.34,15.24 ; 129.54,273.48 C19.1 ; C19.1 130.38,274.32 ; C19.1 128.7,274.32 ; C19.1 129.54,275.16 ; 104.14,62.75 R21.2 ; R21.2 103.39,63.5 ; R21.2 104.89,63.5 ; R21.2 104.14,64.25 ; 50.8,273.4 U35.14 ; U35.14 50.8,275.24 ; U35.14 49.88,274.32 ; U35.14 51.72,274.32 ; 146.48,266.7 C12.2 ; C12.2 148.16,266.7 ; C12.2 147.32,265.86 ; C12.2 147.32,267.54 ; 146.48,274.32 C21.2 ; C21.2 147.32,273.48 ; C21.2 148.16,274.32 ; C21.2 147.32,275.16 ; J5.5 38.1,154.29 ; J5.5 38.1,152.33 ; J5.5 37.12,153.31 ; J5.5 39.08,153.31 ; 45.72,52.42 U10.16 ; U10.16 46.64,53.34 ; U10.16 44.8,53.34 ; U10.16 45.72,54.26 ; 133.7,73.66 U37.10 ; U37.10 135.54,73.66 ; U37.10 134.62,72.74 ; U37.10 134.62,74.58 ; 47.34,33.02 U16.28 ; U16.28 48.26,33.94 ; U16.28 48.26,32.1 ; U16.28 49.18,33.02 ; U3.10 284.48,298.1 ; U3.10 285.4,297.18 ; U3.10 284.48,296.26 ; U3.10 283.56,297.18 ; 275.94,149.86 U23.24 ; U23.24 276.86,150.78 ; U23.24 277.78,149.86 ; U23.24 276.86,148.94 ; R14.1 144.78,236.97 ; R14.1 144.78,235.47 ; R14.1 144.03,236.22 ; R14.1 145.53,236.22 ; U4.1 285.4,246.38 ; U4.1 284.48,245.46 ; U4.1 284.48,247.3 ; U4.1 283.56,246.38 ; 131.24,266.7 C14.2 ; C14.2 132.92,266.7 ; C14.2 132.08,265.86 ; C14.2 132.08,267.54 ; C33.1 138,281.94 ; C33.1 136.32,281.94 ; C33.1 137.16,282.78 ; C33.1 137.16,281.1 ; C18.1 122.76,274.32 ; C18.1 121.92,275.16 ; C18.1 121.92,273.48 ; C18.1 121.08,274.32 ; 162.56,265.86 C10.2 ; C10.2 162.56,267.54 ; C10.2 163.4,266.7 ; C10.2 161.72,266.7 ; 11.78,279.4 U1.1 ; U1.1 12.7,278.48 ; U1.1 12.7,280.32 ; U1.1 13.62,279.4 ; 134.49,155.52 U30.1 ; U30.1 135.56,156.59 ; U30.1 134.49,157.66 ; U30.1 133.42,156.59 ; U9.20 59.34,76.2 ; U9.20 58.42,75.28 ; U9.20 57.5,76.2 ; U9.20 58.42,77.12 ; U6.10 284.48,214.28 ; U6.10 285.4,213.36 ; U6.10 284.48,212.44 ; U6.10 283.56,213.36 ; U12.28 7.62,16.16 ; U12.28 8.54,15.24 ; U12.28 7.62,14.32 ; U12.28 6.7,15.24 ; 189.58,10.16 U22.40 ; U22.40 191.42,10.16 ; U22.40 190.5,11.08 ; U22.40 190.5,9.24 ; U4.10 284.48,270.16 ; U4.10 285.4,269.24 ; U4.10 283.56,269.24 ; U4.10 284.48,268.32 ; U19.7 22.86,122.84 ; U19.7 22.86,121 ; U19.7 21.94,121.92 ; U19.7 23.78,121.92 ; 129.54,265.86 C14.1 ; C14.1 130.38,266.7 ; C14.1 128.7,266.7 ; C14.1 129.54,267.54 ; 11.78,294.64 U1.40 ; U1.40 12.7,295.56 ; U1.40 12.7,293.72 ; U1.40 13.62,294.64 ; C13.2 139.7,267.54 ; C13.2 139.7,265.86 ; C13.2 138.86,266.7 ; C13.2 140.54,266.7 ; U29.10 112.68,127 ; U29.10 111.76,126.08 ; U29.10 110.84,127 ; U29.10 111.76,127.92 ; 174.42,281.94 C26.1 ; C26.1 175.26,282.78 ; C26.1 176.1,281.94 ; C26.1 175.26,281.1 ; U1.33 31.4,294.64 ; U1.33 29.56,294.64 ; U1.33 30.48,295.56 ; U1.33 30.48,293.72 ; 116,266.7 C16.2 ; C16.2 116.84,267.54 ; C16.2 116.84,265.86 ; C16.2 117.68,266.7 ; U25.40 284.48,69.5 ; U25.40 285.4,68.58 ; U25.40 284.48,67.66 ; U25.40 283.56,68.58 ; 115.92,55.88 SW24.3 ; SW24.3 116.84,54.96 ; SW24.3 116.84,56.8 ; SW24.3 117.76,55.88 ; U5.20 277.78,218.44 ; U5.20 276.86,217.52 ; U5.20 276.86,219.36 ; U5.20 275.94,218.44 ; 284.48,240.38 U5.10 ; U5.10 284.48,242.22 ; U5.10 283.56,241.3 ; U5.10 285.4,241.3 ; 193.04,62.58 U32.20 ; U32.20 193.04,64.42 ; U32.20 193.96,63.5 ; U32.20 192.12,63.5 ; U20.7 142.24,16.16 ; U20.7 143.16,15.24 ; U20.7 142.24,14.32 ; U20.7 141.32,15.24 ; 276.86,273.4 U3.20 ; U3.20 275.94,274.32 ; U3.20 277.78,274.32 ; U3.20 276.86,275.24 ; 137.16,273.48 C20.1 ; C20.1 136.32,274.32 ; C20.1 138,274.32 ; C20.1 137.16,275.16 ; 185.42,257.96 J7.1 ; J7.1 185.42,260.2 ; J7.1 184.3,259.08 ; J7.1 186.54,259.08 ; C23.1 160.02,275.16 ; C23.1 160.86,274.32 ; C23.1 159.18,274.32 ; C23.1 160.02,273.48 ; 174.42,266.7 C8.1 ; C8.1 175.26,267.54 ; C8.1 175.26,265.86 ; C8.1 176.1,266.7 ; C27.1 167.64,282.78 ; C27.1 168.48,281.94 ; C27.1 167.64,281.1 ; C27.1 166.8,281.94 ; R9.1 106.68,236.97 ; R9.1 105.93,236.22 ; R9.1 106.68,235.47 ; R9.1 107.43,236.22 ; 87.98,66.04 U17.7 ; U17.7 88.9,65.12 ; U17.7 88.9,66.96 ; U17.7 89.82,66.04 ; 215.9,13.54 215.9,14.61 ; 215.9,14.61 216.97,14.61 ; 215.9,14.61 214.83,14.61 ; 215.9,14.61 215.9,15.67 ; SW24.8 116.84,69.5 ; SW24.8 117.76,68.58 ; SW24.8 116.84,67.66 ; SW24.8 115.92,68.58 ; U26.12 269.24,105.06 ; U26.12 269.24,103.22 ; U26.12 268.32,104.14 ; U26.12 270.16,104.14 ; U25.25 285.4,106.68 ; U25.25 284.48,107.6 ; U25.25 284.48,105.76 ; U25.25 283.56,106.68 ; 200.66,62.58 U32.1 ; U32.1 200.66,64.42 ; U32.1 199.74,63.5 ; U32.1 201.58,63.5 ; 126.08,50.8 U37.20 ; U37.20 127,49.88 ; U37.20 127,51.72 ; U37.20 127.92,50.8 ; C24.2 171.02,274.32 ; C24.2 170.18,273.48 ; C24.2 170.18,275.16 ; C24.2 169.34,274.32 ; 116.84,52.42 SW24.2 ; SW24.2 115.92,53.34 ; SW24.2 116.84,54.26 ; SW24.2 117.76,53.34 ; U8.20 211.74,297.18 ; U8.20 209.9,297.18 ; U8.20 210.82,298.1 ; U8.20 210.82,296.26 ; 225.14,96.52 U28.28 ; U28.28 226.98,96.52 ; U28.28 226.06,97.44 ; U28.28 226.06,95.6 ; 33.02,250.71 R5.1 ; R5.1 32.27,251.46 ; R5.1 33.02,252.21 ; R5.1 33.77,251.46 ; 93.06,287.02 U2.9 ; U2.9 94.9,287.02 ; U2.9 93.98,286.1 ; U2.9 93.98,287.94 ; 121.92,265.86 C15.1 ; C15.1 121.08,266.7 ; C15.1 121.92,267.54 ; C15.1 122.76,266.7 ; 167.64,265.86 C9.1 ; C9.1 168.48,266.7 ; C9.1 167.64,267.54 ; C9.1 166.8,266.7 ; C22.2 155.78,274.32 ; C22.2 154.1,274.32 ; C22.2 154.94,273.48 ; C22.2 154.94,275.16 ; 276.86,245.46 U4.20 ; U4.20 275.94,246.38 ; U4.20 276.86,247.3 ; U4.20 277.78,246.38 ; 176.88,48.26 U21.10 ; U21.10 177.8,47.34 ; U21.10 178.72,48.26 ; U21.10 177.8,49.18 ; C8.2 177.8,267.54 ; C8.2 178.64,266.7 ; C8.2 176.96,266.7 ; C8.2 177.8,265.86 ; U39.20 101.6,44.1 ; U39.20 101.6,42.26 ; U39.20 100.68,43.18 ; U39.20 102.52,43.18 ; C27.2 170.18,282.78 ; C27.2 170.18,281.1 ; C27.2 169.34,281.94 ; C27.2 171.02,281.94 ; 189.51,259.08 J7.2 ; J7.2 190.63,257.96 ; J7.2 190.63,260.2 ; J7.2 191.74,259.08 ; 106.68,273.48 C35.1 ; C35.1 105.84,274.32 ; C35.1 107.52,274.32 ; C35.1 106.68,275.16 ; 283.56,190.5 U6.1 ; U6.1 284.48,189.58 ; U6.1 285.4,190.5 ; U6.1 284.48,191.42 ; 6.7,83.82 U11.1 ; U11.1 8.54,83.82 ; U11.1 7.62,82.9 ; U11.1 7.62,84.74 ; 230.39,83.82 R4.2 ; R4.2 231.14,84.57 ; R4.2 231.14,83.07 ; R4.2 231.89,83.82 ; 6.7,68.58 U10.32 ; U10.32 7.62,69.5 ; U10.32 8.54,68.58 ; U10.32 7.62,67.66 ; C12.1 144.78,267.54 ; C12.1 143.94,266.7 ; C12.1 144.78,265.86 ; C12.1 145.62,266.7 ; C34.2 132.08,282.78 ; C34.2 131.24,281.94 ; C34.2 132.92,281.94 ; C34.2 132.08,281.1 ; 151.56,281.94 C31.1 ; C31.1 152.4,281.1 ; C31.1 152.4,282.78 ; C31.1 153.24,281.94 ; 204.82,58.42 U22.20 ; U22.20 206.66,58.42 ; U22.20 205.74,57.5 ; U22.20 205.74,59.34 ; SW18.3 216.97,29.84 ; SW18.3 215.9,28.78 ; SW18.3 214.83,29.84 ; SW18.3 215.9,30.91 ; 154.1,281.94 C31.2 ; C31.2 155.78,281.94 ; C31.2 154.94,282.78 ; C31.2 154.94,281.1 ; 104.14,52.59 R19.2 ; R19.2 103.39,53.34 ; R19.2 104.89,53.34 ; R19.2 104.14,54.09 ; U3.19 276.86,277.78 ; U3.19 277.78,276.86 ; U3.19 275.94,276.86 ; U3.19 276.86,275.94 ; U18.20 43.18,105.06 ; U18.20 44.1,104.14 ; U18.20 43.18,103.22 ; U18.20 42.26,104.14 ; 141.44,165.1 R2.3 ; R2.3 143.04,165.1 ; R2.3 142.24,164.3 ; R2.3 142.24,165.9 ; 114.3,265.86 C16.1 ; C16.1 113.46,266.7 ; C16.1 115.14,266.7 ; C16.1 114.3,267.54 ; 138.86,281.94 C33.2 ; C33.2 140.54,281.94 ; C33.2 139.7,281.1 ; C33.2 139.7,282.78 ; R18.2 104.14,49.01 ; R18.2 103.39,48.26 ; R18.2 104.14,47.51 ; R18.2 104.89,48.26 ; 116.84,62.58 SW24.6 ; SW24.6 115.92,63.5 ; SW24.6 116.84,64.42 ; SW24.6 117.76,63.5 ; U40.20 139.7,51.72 ; U40.20 140.62,50.8 ; U40.20 139.7,49.88 ; U40.20 138.78,50.8 ; 106.68,265.86 C36.1 ; C36.1 107.52,266.7 ; C36.1 106.68,267.54 ; C36.1 105.84,266.7 ; U39.10 124.46,36.48 ; U39.10 125.38,35.56 ; U39.10 123.54,35.56 ; U39.10 124.46,34.64 ; R11.1 122.67,236.22 ; R11.1 121.92,235.47 ; R11.1 121.92,236.97 ; R11.1 121.17,236.22 ; C20.2 139.7,275.16 ; C20.2 138.86,274.32 ; C20.2 140.54,274.32 ; C20.2 139.7,273.48 ; U40.10 147.32,74.58 ; U40.10 148.24,73.66 ; U40.10 147.32,72.74 ; U40.10 146.4,73.66 ; U6.20 276.86,191.42 ; U6.20 277.78,190.5 ; U6.20 275.94,190.5 ; U6.20 276.86,189.58 ; 7.62,141.32 U19.26 ; U19.26 7.62,143.16 ; U19.26 8.54,142.24 ; U19.26 6.7,142.24 ; 283.56,116.84 U25.21 ; U25.21 284.48,115.92 ; U25.21 284.48,117.76 ; U25.21 285.4,116.84 ; U35.7 66.96,266.7 ; U35.7 66.04,267.62 ; U35.7 65.12,266.7 ; U35.7 66.04,265.78 ; 250.54,109.22 U27.20 ; U27.20 251.46,110.14 ; U27.20 252.38,109.22 ; U27.20 251.46,108.3 ; 228.6,115.92 U27.10 ; U27.10 228.6,117.76 ; U27.10 227.68,116.84 ; U27.10 229.52,116.84 ; C17.2 117.68,274.32 ; C17.2 116,274.32 ; C17.2 116.84,273.48 ; C17.2 116.84,275.16 ; R20.2 104.14,59.17 ; R20.2 104.89,58.42 ; R20.2 104.14,57.67 ; R20.2 103.39,58.42 ; 187.96,62.58 U34.1 ; U34.1 187.96,64.42 ; U34.1 188.88,63.5 ; U34.1 187.04,63.5
  BOTTOM w0.508: 41.94,218.44 v1(41.94,178.49)
  vias: v1(45.62,211.99) v1(46.31,209.6) v1(49.94,211.99) v1(116.74,47.96) v1(171.6,157.6)
VDD: length 4.3
  POWER w0.508: 137.03,155.52 U30.2 ; U30.2 137.03,157.66 ; U30.2 135.96,156.59 ; U30.2 138.1,156.59
A0: length 597.2
  TOP w0.508: U23.19 v1(279.3,162.56) ; v1(153.82,71.17) 165.1,71.17 U38.15 ; U21.1 154.94,47.04 v1(93.14,47.04) v1(66.04,47.04) ; U40.15 139.7,62.38 v1(153.82,62.38) ; v1(279.3,105.71) 153.82,105.71 v1(153.82,104.14) U29.1
  BOTTOM w0.508: 279.3,193.04 280.57,193.04 280.57,244.93 295.73,244.93 295.73,251.46 J10.39 ; 279.3,193.04 U6.19 ; 279.3,193.04 v1(279.3,162.56) v1(279.3,105.71) 279.3,99.06 U25.28 ; U9.1 v1(66.04,47.04) ; U21.1 153.82,48.26 v1(153.82,62.38) v1(153.82,71.17) v1(153.82,104.14) ; U14.1 93.14,7.62 v1(93.14,47.04)
A1: length 894.9
  TOP w0.508: 184.73,59.54 163.68,59.54 163.68,53.34 U40.2 ; 184.73,59.54 v1(184.73,61.54) ; 184.73,59.54 190.5,59.54 U22.21 ; U20.8 144.78,16.36 87.63,16.36 87.63,18.16 v1(66.04,18.16) ; U38.2 154.94,67.41 v1(149.17,67.41) v1(142.52,67.41) 130.66,67.41 130.66,74.78 100.65,74.78 100.65,69.7 88.9,69.7 ; U16.21 66.04,36.04 v1(31.6,36.04) 25.4,36.04 U15.21 ; U19.8 v1(34.14,124.46) ; U17.8 88.9,69.7 ; 88.9,69.7 v1(66.73,69.7) ; v1(184.73,95.1) v1(224.94,95.1) 224.94,93.98 U28.27 ; U25.27 281.89,101.6 281.89,107.37 v1(277.98,107.37) v1(224.94,107.37)
  BOTTOM w0.508: v1(224.94,107.37) v1(224.94,95.1) ; 275.74,200.66 275.74,191.62 277.98,191.62 277.98,160.02 ; 275.74,200.66 275.74,204.32 279.3,204.32 279.3,250.04 294.64,250.04 J10.37 ; 275.74,200.66 U6.16 ; U13.21 v1(66.04,18.16) 64.92,18.16 64.92,27.15 66.04,27.15 U16.21 66.04,44.3 66.73,44.3 v1(66.73,69.7) ; v1(142.52,67.41) 142.52,134.52 142.11,134.52 U30.4 ; U12.21 25.4,23.98 24.28,23.98 24.28,27.15 25.4,27.15 U15.21 ; v1(31.6,36.04) 32.28,36.04 32.28,44.83 35.56,44.83 U10.12 35.56,65.89 36.68,65.89 36.68,72.24 35.56,72.24 U11.12 35.56,95.1 34.14,95.1 v1(34.14,124.46) ; U40.2 149.17,53.34 v1(149.17,67.41) ; v1(184.73,61.54) v1(184.73,95.1) ; 277.98,160.02 U23.20 ; 277.98,160.02 v1(277.98,107.37)
A2: length 846.7
  TOP w0.508: v1(143.21,106.68) 141.15,106.68 ; 141.15,106.68 U29.2 ; 141.15,106.68 141.15,110.97 v1(144.65,110.97) 223.98,110.97 223.98,111.71 v1(272.52,111.71) v1(281.89,111.71) ; U40.3 v1(143.66,55.88) ; v1(274.95,203.2) U6.15 ; U21.2 157.48,46.3 v1(143.66,46.3) v1(90.02,46.3) v1(60.96,46.3) v1(33.02,46.3) v1(20.32,46.3)
  BOTTOM w0.508: U38.3 157.48,60.17 156.36,60.17 156.36,48.26 U21.2 ; v1(143.21,106.68) 143.21,57.2 143.66,57.2 v1(143.66,55.88) v1(143.66,46.3) 143.66,18.26 147.32,18.26 U20.9 ; J10.35 294.64,247.5 279.93,247.5 279.93,203.2 U6.15 ; U17.9 87.15,71.12 87.15,59.54 90.02,59.54 v1(90.02,46.3) ; v1(33.02,46.3) U10.11 34.14,53.34 34.14,70.33 33.02,70.33 U11.11 33.02,88.11 31.6,88.11 31.6,103.99 21.74,103.99 21.74,115.42 24.61,115.42 24.61,127 U19.9 ; v1(274.95,203.2) 274.95,158.11 272.9,158.11 272.9,149.86 U24.1 271.78,111.71 v1(272.52,111.71) ; U12.23 20.32,20.17 19.2,20.17 19.2,33.02 U15.23 v1(20.32,46.3) ; v1(60.96,46.3) U16.23 60.96,30.96 59.84,30.96 59.84,22.71 60.96,22.71 U13.23 ; v1(281.89,111.71) 281.89,104.14 U25.26 ; U30.5 v1(144.65,110.97)
A3: length 710
  TOP w0.508: v1(50.8,84.94) 30.48,84.94 U11.10 ; U29.3 108.43,109.22 108.43,105.26 50.8,105.26 U18.1 ; v1(268.76,210.82) U6.12 v1(281.25,210.82) ; v1(268.76,119.96) 251.46,119.96 ; 251.46,119.96 v1(161.14,119.96) ; 251.46,119.96 U27.1 ; U15.24 17.78,39.37 31.6,39.37 v1(31.6,42.88) 31.6,44.35 v1(57.3,44.35) 57.3,45.62 160.02,45.62 U21.3 ; U24.2 v1(268.76,152.4) ; U40.4 v1(161.14,58.42)
  BOTTOM w0.508: U11.10 31.6,83.82 31.6,53.34 ; U21.3 161.14,48.26 v1(161.14,58.42) 161.14,66.04 ; 161.14,66.04 U38.4 ; 161.14,66.04 v1(161.14,119.96) ; U15.24 17.78,27.15 16.66,27.15 16.66,21.44 17.78,21.44 U12.24 ; v1(268.76,210.82) v1(268.76,152.4) v1(268.76,119.96) ; v1(281.25,210.82) 281.25,242.42 294.64,242.42 J10.33 ; 57.3,33.02 v1(57.3,44.35) ; 57.3,33.02 U16.24 ; 57.3,33.02 57.3,20.17 58.42,20.17 U13.24 ; 31.6,53.34 U10.10 ; 31.6,53.34 v1(31.6,42.88) ; v1(50.8,84.94) U18.1
A4: length 653.1
  TOP w0.508: 248.92,115.72 248.92,114.99 163.05,114.99 v1(163.05,112.5) 163.05,111.76 U29.4 111.76,110.34 106.53,110.34 106.53,107.8 100.86,107.8 100.86,106.68 v1(52.6,106.68) U18.2 ; 248.92,115.72 v1(270.66,115.72) ; 248.92,115.72 U27.2 ; U40.5 v1(163.68,60.96) ; v1(27.94,35.31) 55.88,35.31 U16.25 ; U11.9 27.94,87.53 v1(52.6,87.53) ; U6.9 284.48,209.45 v1(272.9,209.45) ; U15.25 15.24,40.69 v1(27.94,40.69)
  BOTTOM w0.508: U38.5 163.68,66.04 ; 163.68,66.04 163.68,93.19 163.05,93.19 v1(163.05,112.5) ; 163.68,66.04 v1(163.68,60.96) 163.68,48.26 U21.4 ; U16.25 54.76,33.02 54.76,21.44 55.88,21.44 U13.25 ; J10.31 294.64,239.85 287.66,239.85 287.66,210.82 U6.9 ; 270.66,154.94 v1(270.66,115.72) ; 270.66,154.94 270.66,163.68 272.9,163.68 v1(272.9,209.45) ; 270.66,154.94 U24.3 ; v1(27.94,35.31) v1(27.94,40.69) U10.9 27.94,64.34 29.06,64.34 29.06,79.22 27.94,79.22 U11.9 ; U15.25 15.24,29.69 14.12,29.69 14.12,21.44 15.24,21.44 U12.25 ; v1(52.6,87.53) v1(52.6,106.68)
